# Allegro board Expand.brd
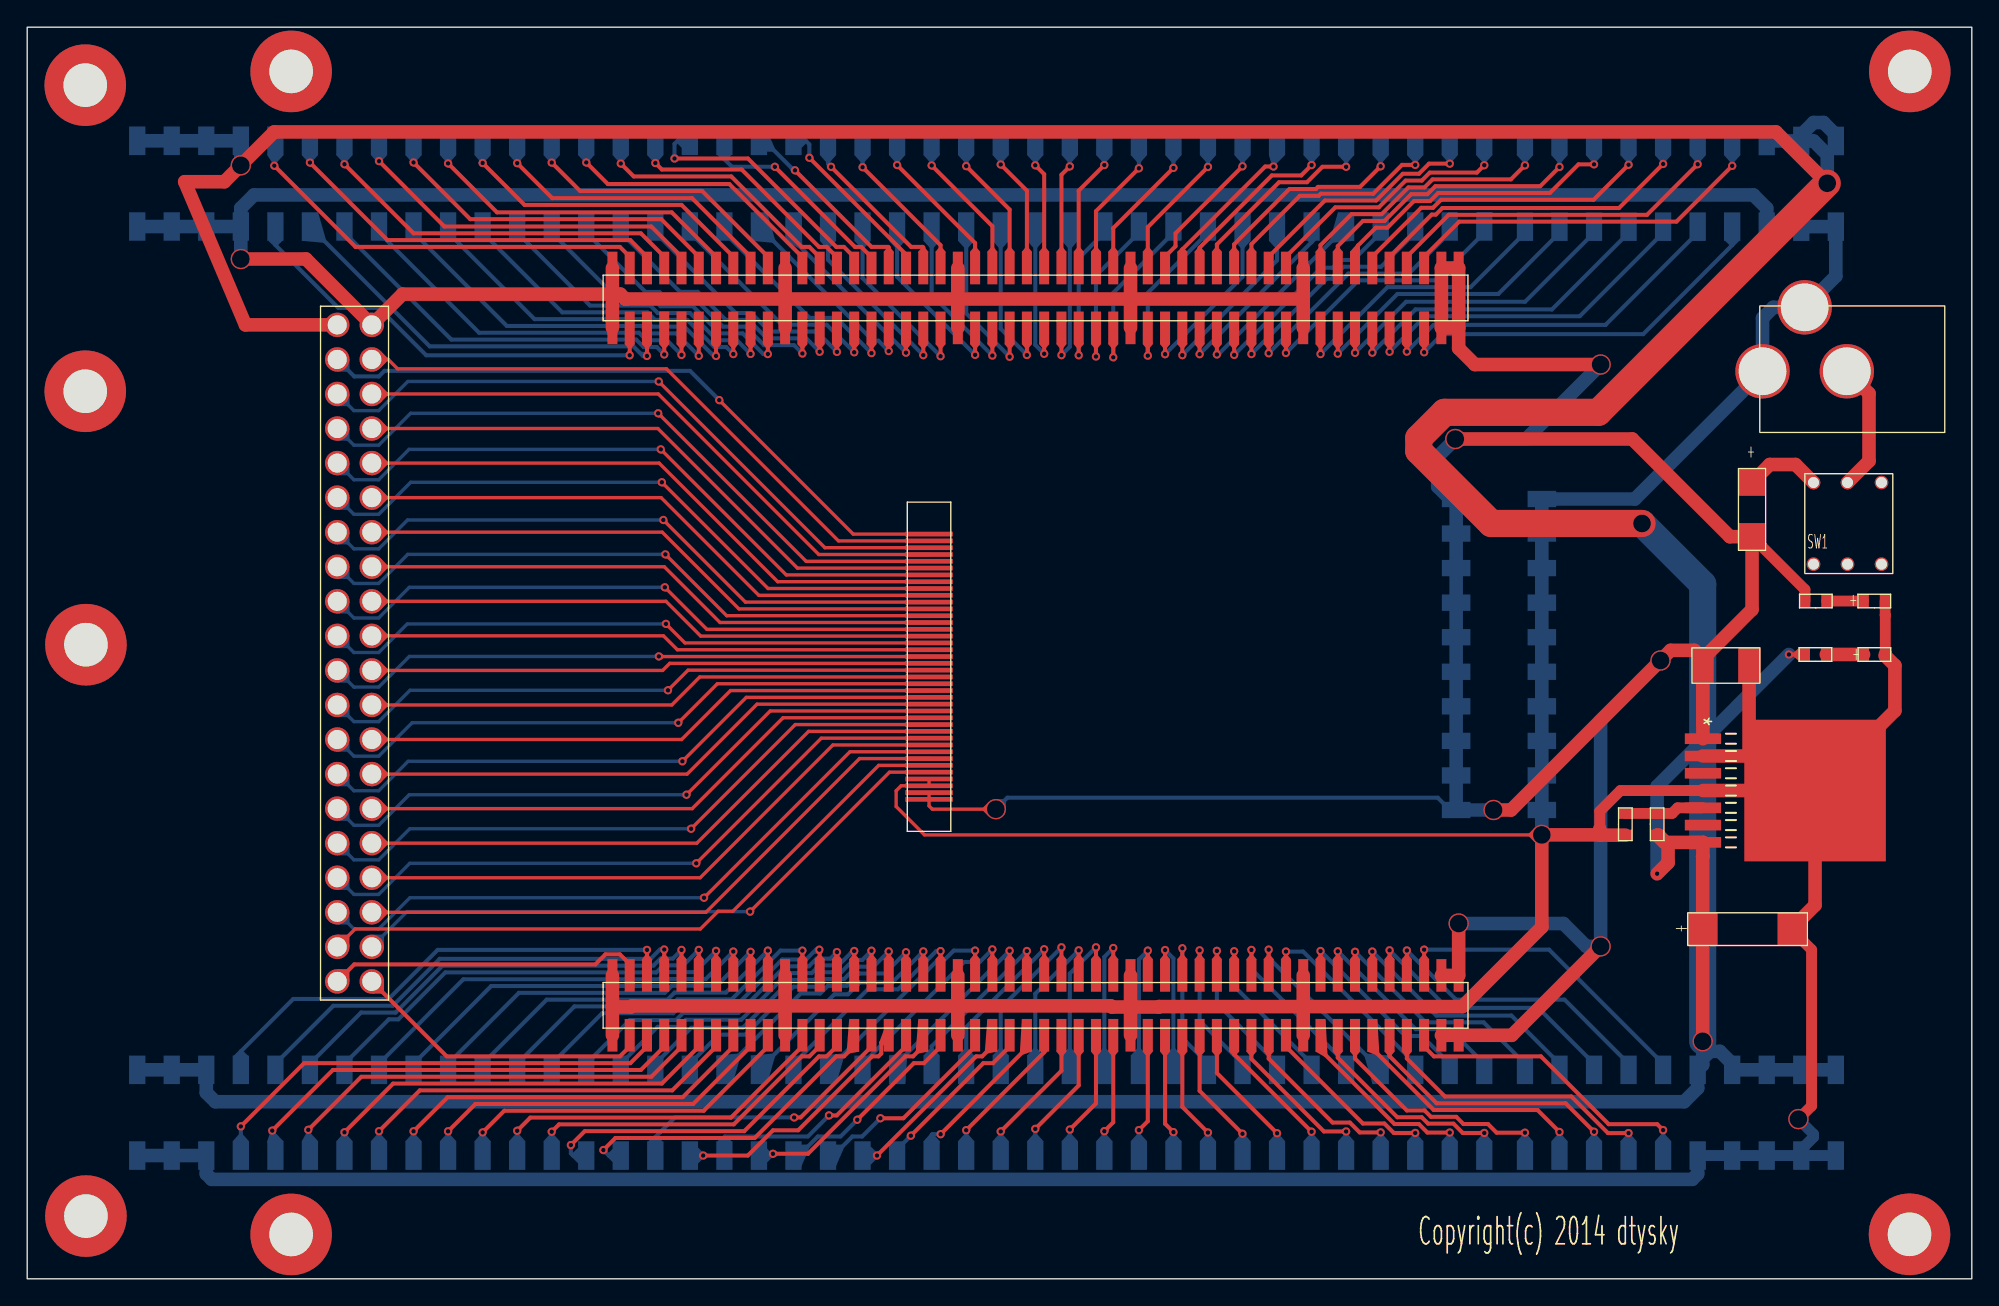
[diagram p0: board, top side]
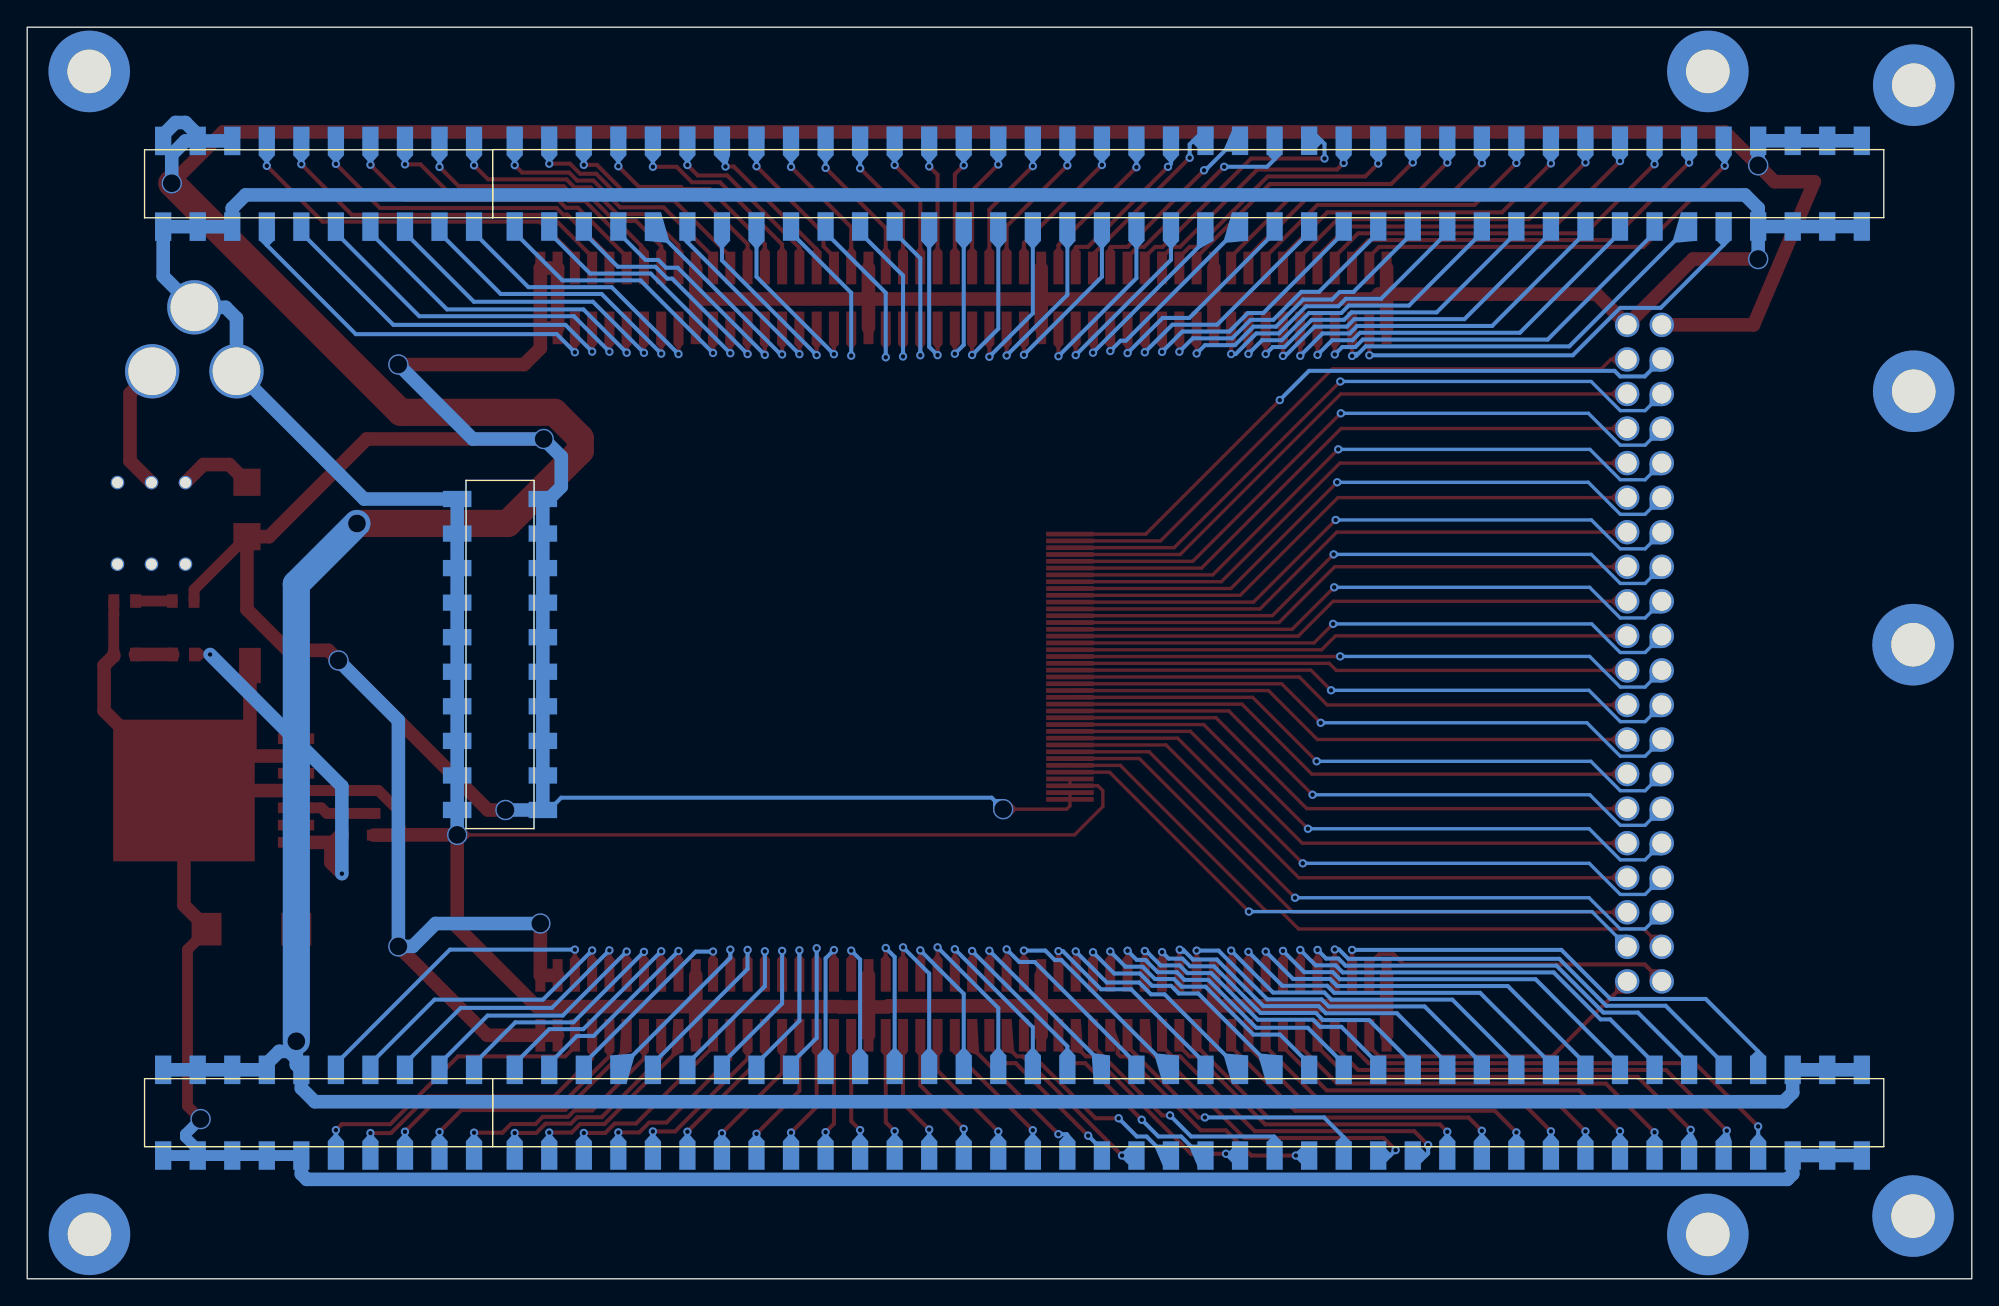
[diagram p1: board, bottom side, seen from below]

Outline 143 x 92 mm; copper layers: TOP, BOTTOM. Coordinates in mm from the lower left corner of the outline.
Outline path: rectangle 0,0 143,92

## Placement (name value [footprint] x y rotation side)
C1  22u  [SMD_1210]  124.92 45.08 90 top
C2  220u  [SMD_7343]  126.51 25.7 90 top
D1  1N5819  [SS14]  125.34 60.55 270 top
D3  0603_LED  [SMD_0603]  135.83 49.82 90 top
D4  0603_LED  [SMD_0603]  135.84 45.89 90 top
J1  Header_2X50_SMT  [HEADER_2X50__1D27_G_SMD]  74.15 72.1 90 top
J2  FPC  [FPC_0D5_40]  66.32 44.99 0 top
J3  Header_2X50_SMT  [HEADER_2X50__1D27_G_SMD]  74.15 20.1 90 top
J4  Header_2X40  [HEADER_2X40_2D54_SMT_M]  57.62 80.5 270 bottom
J5  Header_2X10  [HEADER_2X10_2D54_SMT_M]  121.57 80.49 270 bottom
J6  Header_2X20  [HEADER_2X20_2D54_DIP_G]  24.07 45.99 0 top
J7  Header_2X10  [HEADER_2X10_2D54_SMT_M]  108.23 45.89 180 bottom
J8  Header_2X40  [HEADER_2X40_2D54_SMT_M]  57.62 12.21 270 bottom
J9  Header_2X10  [HEADER_2X10_2D54_SMT_M]  121.57 12.21 270 bottom
J10  Header_1  [HOLE_3D2]  4.32 4.61 0 top
J11  Header_1  [HOLE_3D2]  4.32 46.61 0 top
J12  Header_1  [HOLE_3D2]  4.27 65.24 0 top
J13  Header_1  [HOLE_3D2]  4.27 87.74 0 top
J14  Header_1  [HOLE_3D2]  19.41 88.75 0 top
J15  Header_1  [HOLE_3D2]  138.44 88.75 0 top
J16  Header_1  [HOLE_3D2]  19.41 3.26 0 top
J17  Header_1  [HOLE_3D2]  138.42 3.27 0 top
R1  1K  [SMD_0603]  131.53 49.82 90 top
R2  1K  [SMD_0603]  131.5 45.89 90 top
R3  3.32K  [SMD_0603]  119.86 33.41 0 top
R4  1.07K  [SMD_0603]  117.52 33.41 0 top
SW1  Switch_6Pin  [SWITCH_6PIN]  134.96 69.13 0 top
U1  DC INPUT JACK  [DC_JACK]  132.41 69.51 180 top
U2  Value  [TZA07A]  131.32 35.89 270 top

## Library data of the parts
C1 C2 = CAP POL
D1 D3 D4 = DIODE SCHOTTKY
J1 J3 = Header_2X50
J2 J6 = Header_2X20
J4 J8 = Header_2X40
J5 J7 J9 = Header_2X10
J10-J17 = Header_1
R1-R4 = R
SW1 = Switch_6Pin
U1 = DC INPUT JACK
U2 = LMZ22005_NDW_7

## Footprints (pads in the part's own frame, mm; a bottom-side part is the same pattern mirrored in y, then rotated)
DC_JACK
  round 4 hole 3.5: 1(1.7,-1.9) 2(-1.4,2.8) 3(4.8,2.8)
FPC_0D5_40
  rect 3.5x0.35 smd: 1(0,9.75) 2(0,9.25) 3(0,8.75) 4(0,8.25) 5(0,7.75) 6(0,7.25) 7(0,6.75) 8(0,6.25) 9(0,5.75) 10(0,5.25) 11(0,4.75) 12(0,4.25) 13(0,3.75) 14(0,3.25) 15(0,2.75) 16(0,2.25) 17(0,1.75) 18(0,1.25) 19(0,0.75) 20(0,0.25) 21(0,-0.25) 22(0,-0.75) 23(0,-1.25) 24(0,-1.75) 25(0,-2.25) 26(0,-2.75) 27(0,-3.25) 28(0,-3.75) 29(0,-4.25) 30(0,-4.75) 31(0,-5.25) 32(0,-5.75) 33(0,-6.25) 34(0,-6.75) 35(0,-7.25) 36(0,-7.75) 37(0,-8.25) 38(0,-8.75) 39(0,-9.25) 40(0,-9.75)
HEADER_2X10_2D54_SMT_M
  rect 2.1x1.2 smd: 1(-3.15,11.43) 2(-3.15,8.89) 3(-3.15,6.35) 4(-3.15,3.81) 5(-3.15,1.27) 6(-3.15,-1.27) 7(-3.15,-3.81) 8(-3.15,-6.35) 9(-3.15,-8.89) 10(-3.15,-11.43) 11(3.15,-11.43) 12(3.15,-8.89) 13(3.15,-6.35) 14(3.15,-3.81) 15(3.15,-1.27) 16(3.15,1.27) 17(3.15,3.81) 18(3.15,6.35) 19(3.15,8.89) 20(3.15,11.43)
HEADER_2X20_2D54_DIP_G
  round 1.8 hole 1.4: 1(-1.27,24.13) 2(-1.27,21.59) 3(-1.27,19.05) 4(-1.27,16.51) 5(-1.27,13.97) 6(-1.27,11.43) 7(-1.27,8.89) 8(-1.27,6.35) 9(-1.27,3.81) 10(-1.27,1.27) 11(-1.27,-1.27) 12(-1.27,-3.81) 13(-1.27,-6.35) 14(-1.27,-8.89) 15(-1.27,-11.43) 16(-1.27,-13.97) 17(-1.27,-16.51) 18(-1.27,-19.05) 19(-1.27,-21.59) 20(-1.27,-24.13) 21(1.27,-24.13) 22(1.27,-21.59) 23(1.27,-19.05) 24(1.27,-16.51) 25(1.27,-13.97) 26(1.27,-11.43) 27(1.27,-8.89) 28(1.27,-6.35) 29(1.27,-3.81) 30(1.27,-1.27) 31(1.27,1.27) 32(1.27,3.81) 33(1.27,6.35) 34(1.27,8.89) 35(1.27,11.43) 36(1.27,13.97) 37(1.27,16.51) 38(1.27,19.05) 39(1.27,21.59) 40(1.27,24.13)
HEADER_2X40_2D54_SMT_M
  rect 2.1x1.2 smd: 1(-3.15,49.53) 2(-3.15,46.99) 3(-3.15,44.45) 4(-3.15,41.91) 5(-3.15,39.37) 6(-3.15,36.83) 7(-3.15,34.29) 8(-3.15,31.75) 9(-3.15,29.21) 10(-3.15,26.67) 11(-3.15,24.13) 12(-3.15,21.59) 13(-3.15,19.05) 14(-3.15,16.51) 15(-3.15,13.97) 16(-3.15,11.43) 17(-3.15,8.89) 18(-3.15,6.35) 19(-3.15,3.81) 20(-3.15,1.27) 21(-3.15,-1.27) 22(-3.15,-3.81) 23(-3.15,-6.35) 24(-3.15,-8.89) 25(-3.15,-11.43) 26(-3.15,-13.97) 27(-3.15,-16.51) 28(-3.15,-19.05) 29(-3.15,-21.59) 30(-3.15,-24.13) 31(-3.15,-26.67) 32(-3.15,-29.21) 33(-3.15,-31.75) 34(-3.15,-34.29) 35(-3.15,-36.83) 36(-3.15,-39.37) 37(-3.15,-41.91) 38(-3.15,-44.45) 39(-3.15,-46.99) 40(-3.15,-49.53) 41(3.15,-49.53) 42(3.15,-46.99) 43(3.15,-44.45) 44(3.15,-41.91) 45(3.15,-39.37) 46(3.15,-36.83) 47(3.15,-34.29) 48(3.15,-31.75) 49(3.15,-29.21) 50(3.15,-26.67) 51(3.15,-24.13) 52(3.15,-21.59) 53(3.15,-19.05) 54(3.15,-16.51) 55(3.15,-13.97) 56(3.15,-11.43) 57(3.15,-8.89) 58(3.15,-6.35) 59(3.15,-3.81) 60(3.15,-1.27) 61(3.15,1.27) 62(3.15,3.81) 63(3.15,6.35) 64(3.15,8.89) 65(3.15,11.43) 66(3.15,13.97) 67(3.15,16.51) 68(3.15,19.05) 69(3.15,21.59) 70(3.15,24.13) 71(3.15,26.67) 72(3.15,29.21) 73(3.15,31.75) 74(3.15,34.29) 75(3.15,36.83) 76(3.15,39.37) 77(3.15,41.91) 78(3.15,44.45) 79(3.15,46.99) 80(3.15,49.53)
HEADER_2X50__1D27_G_SMD
  rect 2.4x0.74 smd: 1(-2.2,31.115) 2(-2.2,29.845) 3(-2.2,28.575) 4(-2.2,27.305) 5(-2.2,26.035) 6(-2.2,24.765) 7(-2.2,23.495) 8(-2.2,22.225) 9(-2.2,20.955) 10(-2.2,19.685) 11(-2.2,18.415) 12(-2.2,17.145) 13(-2.2,15.875) 14(-2.2,14.605) 15(-2.2,13.335) 16(-2.2,12.065) 17(-2.2,10.795) 18(-2.2,9.525) 19(-2.2,8.255) 20(-2.2,6.985) 21(-2.2,5.715) 22(-2.2,4.445) 23(-2.2,3.175) 24(-2.2,1.905) 25(-2.2,0.635) 26(-2.2,-0.635) 27(-2.2,-1.905) 28(-2.2,-3.175) 29(-2.2,-4.445) 30(-2.2,-5.715) 31(-2.2,-6.985) 32(-2.2,-8.255) 33(-2.2,-9.525) 34(-2.2,-10.795) 35(-2.2,-12.065) 36(-2.2,-13.335) 37(-2.2,-14.605) 38(-2.2,-15.875) 39(-2.2,-17.145) 40(-2.2,-18.415) 41(-2.2,-19.685) 42(-2.2,-20.955) 43(-2.2,-22.225) 44(-2.2,-23.495) 45(-2.2,-24.765) 46(-2.2,-26.035) 47(-2.2,-27.305) 48(-2.2,-28.575) 49(-2.2,-29.845) 50(-2.2,-31.115) 51(2.2,-31.115) 52(2.2,-29.845) 53(2.2,-28.575) 54(2.2,-27.305) 55(2.2,-26.035) 56(2.2,-24.765) 57(2.2,-23.495) 58(2.2,-22.225) 59(2.2,-20.955) 60(2.2,-19.685) 61(2.2,-18.415) 62(2.2,-17.145) 63(2.2,-15.875) 64(2.2,-14.605) 65(2.2,-13.335) 66(2.2,-12.065) 67(2.2,-10.795) 68(2.2,-9.525) 69(2.2,-8.255) 70(2.2,-6.985) 71(2.2,-5.715) 72(2.2,-4.445) 73(2.2,-3.175) 74(2.2,-1.905) 75(2.2,-0.635) 76(2.2,0.635) 77(2.2,1.905) 78(2.2,3.175) 79(2.2,4.445) 80(2.2,5.715) 81(2.2,6.985) 82(2.2,8.255) 83(2.2,9.525) 84(2.2,10.795) 85(2.2,12.065) 86(2.2,13.335) 87(2.2,14.605) 88(2.2,15.875) 89(2.2,17.145) 90(2.2,18.415) 91(2.2,19.685) 92(2.2,20.955) 93(2.2,22.225) 94(2.2,23.495) 95(2.2,24.765) 96(2.2,26.035) 97(2.2,27.305) 98(2.2,28.575) 99(2.2,29.845) 100(2.2,31.115)
HOLE_3D2
  round 6 hole 3.2: 1(0,0)
SMD_0603
  rect 1x0.8 smd: 1(0,0.8) 2(0,-0.8)
SMD_1210
  rect 2.6x1.6 smd: 1(0,1.7) 2(0,-1.7)
SMD_7343
  rect 2.4x2.2 smd: 1(0,3.3) 2(0,-3.3)
SS14
  rect 2x2 smd: 1(2,1.5) 2(6,1.5)
SWITCH_6PIN
  round 1 hole 0.8: 1(-3.6,-10.6) 2(-1.1,-10.6) 3(1.4,-10.6) 4(1.4,-16.6) 5(-1.1,-16.6) 6(-3.6,-16.6)
TZA07A
  rect 0.787x2.667 smd: 1(-3.81,-8.09) 2(-2.54,-8.09) 3(-1.27,-8.09) 4(0,-8.09) 5(1.27,-8.09) 6(2.54,-8.09) 7(3.81,-8.09)
  rect 10.414x10.414 smd: 8(0,0.152)

## Nets
GND: C1.2 C2.2 D3.2(CATHODE) D4.2(CATHODE) J1.1(DIP_1) J1.11(DIP_11) J1.21(DIP_21) J1.31(DIP_31) J1.41(DIP_41) J1.60(DIP_60) J1.70(DIP_70) J1.80(DIP_80) J1.90(DIP_90) J1.100(DIP_100) J2.37(DIP_37) J2.38(DIP_38) J3.1(DIP_1) J3.11(DIP_11) J3.21(DIP_21) J3.31(DIP_31) J3.41(DIP_41) J3.60(DIP_60) J3.70(DIP_70) J3.80(DIP_80) J3.90(DIP_90) J3.100(DIP_100) J4.77(DIP_77) J4.78(DIP_78) J4.79(DIP_79) J4.80(DIP_80) J5.11(DIP_11) J5.12(DIP_12) J5.13(DIP_13) J6.40(DIP_40) J7.1(DIP_1) J7.2(DIP_2) J7.3(DIP_3) J7.4(DIP_4) J7.5(DIP_5) J7.6(DIP_6) J7.7(DIP_7) J7.8(DIP_8) J7.9(DIP_9) J7.10(DIP_10) J8.78(DIP_78) J8.79(DIP_79) J8.80(DIP_80) J9.11(DIP_11) J9.12(DIP_12) J9.13(DIP_13) J9.14(DIP_14) J9.15(DIP_15) R4.2 U1.1(GND#1) U1.3(GND#3) U2.2(SYNC) U2.4(AGND) U2.8
VCC: C2.1 J4.1(DIP_1) J4.2(DIP_2) J4.3(DIP_3) J4.4(DIP_4) J5.8(DIP_8) J5.9(DIP_9) J5.10(DIP_10) J6.1(DIP_1) J8.1(DIP_1) J8.2(DIP_2) J8.3(DIP_3) J9.6(DIP_6) J9.7(DIP_7) J9.8(DIP_8) J9.9(DIP_9) J9.10(DIP_10) R2.1 R3.2 U2.7(VOUT)
DATA_A0: J1.53(DIP_53) J5.7(DIP_7)
DATA_A1: J1.54(DIP_54) J5.6(DIP_6)
DATA_A2: J1.55(DIP_55) J5.5(DIP_5)
DATA_A3: J1.56(DIP_56) J5.4(DIP_4)
DATA_A4: J1.57(DIP_57) J5.3(DIP_3)
DATA_A5: J1.58(DIP_58) J5.2(DIP_2)
DATA_A6: J1.59(DIP_59) J5.1(DIP_1)
DATA_A7: J1.61(DIP_61) J4.40(DIP_40)
DATA_A8: J1.62(DIP_62) J4.39(DIP_39)
DATA_A9: J1.63(DIP_63) J4.38(DIP_38)
DATA_A10: J1.64(DIP_64) J4.37(DIP_37)
DATA_A11: J1.65(DIP_65) J4.36(DIP_36)
DATA_A12: J1.66(DIP_66) J4.35(DIP_35)
DATA_A13: J1.67(DIP_67) J4.34(DIP_34)
DATA_A14: J1.68(DIP_68) J4.33(DIP_33)
DATA_A15: J1.69(DIP_69) J4.32(DIP_32)
DATA_A16: J1.71(DIP_71) J4.31(DIP_31)
DATA_A17: J1.72(DIP_72) J4.30(DIP_30)
DATA_A18: J1.73(DIP_73) J4.29(DIP_29)
DATA_A19: J1.74(DIP_74) J4.28(DIP_28)
DATA_A20: J1.75(DIP_75) J4.27(DIP_27)
DATA_A21: J1.76(DIP_76) J4.26(DIP_26)
DATA_A22: J1.77(DIP_77) J4.25(DIP_25)
DATA_A23: J1.78(DIP_78) J4.24(DIP_24)
DATA_A24: J1.79(DIP_79) J4.23(DIP_23)
DATA_A25: J1.81(DIP_81) J4.22(DIP_22)
DATA_A26: J1.82(DIP_82) J4.21(DIP_21)
DATA_A27: J1.83(DIP_83) J4.20(DIP_20)
DATA_A28: J1.84(DIP_84) J4.19(DIP_19)
DATA_A29: J1.85(DIP_85) J4.18(DIP_18)
DATA_A30: J1.86(DIP_86) J4.17(DIP_17)
DATA_A31: J1.87(DIP_87) J4.16(DIP_16)
DATA_A32: J1.88(DIP_88) J4.15(DIP_15)
DATA_A33: J1.89(DIP_89) J4.14(DIP_14)
DATA_A34: J1.91(DIP_91) J4.13(DIP_13)
DATA_A35: J1.92(DIP_92) J4.12(DIP_12)
DATA_A36: J1.93(DIP_93) J4.11(DIP_11)
DATA_A37: J1.94(DIP_94) J4.10(DIP_10)
DATA_A38: J1.95(DIP_95) J4.9(DIP_9)
DATA_A39: J1.96(DIP_96) J4.8(DIP_8)
DATA_A40: J1.97(DIP_97) J4.7(DIP_7)
DATA_A41: J1.98(DIP_98) J4.6(DIP_6)
DATA_A42: J1.99(DIP_99) J4.5(DIP_5)
DATA_B0: J1.48(DIP_48) J5.14(DIP_14)
DATA_B1: J1.47(DIP_47) J5.15(DIP_15)
DATA_B2: J1.46(DIP_46) J5.16(DIP_16)
DATA_B3: J1.45(DIP_45) J5.17(DIP_17)
DATA_B4: J1.44(DIP_44) J5.18(DIP_18)
DATA_B5: J1.43(DIP_43) J5.19(DIP_19)
DATA_B6: J1.42(DIP_42) J5.20(DIP_20)
DATA_B7: J1.40(DIP_40) J4.41(DIP_41)
DATA_B8: J1.39(DIP_39) J4.42(DIP_42)
DATA_B9: J1.38(DIP_38) J4.43(DIP_43)
DATA_B10: J1.37(DIP_37) J4.44(DIP_44)
DATA_B11: J1.36(DIP_36) J4.45(DIP_45)
DATA_B12: J1.35(DIP_35) J4.46(DIP_46)
DATA_B13: J1.34(DIP_34) J4.47(DIP_47)
DATA_B14: J1.33(DIP_33) J4.48(DIP_48)
DATA_B15: J1.32(DIP_32) J4.49(DIP_49)
DATA_B16: J1.30(DIP_30) J4.50(DIP_50)
DATA_B17: J1.29(DIP_29) J4.51(DIP_51)
DATA_B18: J1.28(DIP_28) J4.52(DIP_52)
DATA_B19: J1.27(DIP_27) J4.53(DIP_53)
DATA_B20: J1.26(DIP_26) J4.54(DIP_54)
DATA_B21: J1.25(DIP_25) J4.55(DIP_55)
DATA_B22: J1.24(DIP_24) J4.56(DIP_56)
DATA_B23: J1.23(DIP_23) J4.57(DIP_57)
DATA_B24: J1.22(DIP_22) J4.58(DIP_58)
DATA_B25: J1.20(DIP_20) J4.59(DIP_59)
DATA_B26: J1.19(DIP_19) J4.60(DIP_60)
DATA_B27: J1.18(DIP_18) J4.61(DIP_61)
DATA_B28: J1.17(DIP_17) J4.62(DIP_62)
DATA_B29: J1.16(DIP_16) J4.63(DIP_63)
DATA_B30: J1.15(DIP_15) J4.64(DIP_64)
DATA_B31: J1.14(DIP_14) J4.65(DIP_65)
DATA_B32: J1.13(DIP_13) J4.66(DIP_66)
DATA_B33: J1.12(DIP_12) J4.67(DIP_67)
DATA_B34: J1.10(DIP_10) J4.68(DIP_68)
DATA_B35: J1.9(DIP_9) J4.69(DIP_69)
DATA_B36: J1.8(DIP_8) J4.70(DIP_70)
DATA_B37: J1.7(DIP_7) J4.71(DIP_71)
DATA_B38: J1.6(DIP_6) J4.72(DIP_72)
DATA_B39: J1.5(DIP_5) J4.73(DIP_73)
DATA_B40: J1.4(DIP_4) J4.74(DIP_74)
DATA_B41: J1.3(DIP_3) J4.75(DIP_75)
DATA_B42: J1.2(DIP_2) J4.76(DIP_76)
DATA_C0: J3.53(DIP_53) J9.5(DIP_5)
DATA_C1: J3.54(DIP_54) J9.4(DIP_4)
DATA_C2: J3.55(DIP_55) J9.3(DIP_3)
DATA_C3: J3.56(DIP_56) J9.2(DIP_2)
DATA_C4: J3.57(DIP_57) J9.1(DIP_1)
DATA_C5: J3.58(DIP_58) J8.40(DIP_40)
DATA_C6: J3.59(DIP_59) J8.39(DIP_39)
DATA_C7: J3.61(DIP_61) J8.38(DIP_38)
DATA_C8: J3.62(DIP_62) J8.37(DIP_37)
DATA_C9: J3.63(DIP_63) J8.36(DIP_36)
DATA_C10: J3.64(DIP_64) J8.35(DIP_35)
DATA_C11: J3.65(DIP_65) J8.34(DIP_34)
DATA_C12: J3.66(DIP_66) J8.33(DIP_33)
DATA_C13: J3.67(DIP_67) J8.32(DIP_32)
DATA_C14: J3.68(DIP_68) J8.31(DIP_31)
DATA_C15: J3.69(DIP_69) J8.30(DIP_30)
DATA_C16: J3.71(DIP_71) J8.29(DIP_29)
DATA_C17: J3.72(DIP_72) J8.28(DIP_28)
DATA_C18: J3.73(DIP_73) J8.27(DIP_27)
DATA_C19: J3.74(DIP_74) J8.26(DIP_26)
DATA_C20: J3.75(DIP_75) J8.25(DIP_25)
DATA_C21: J3.76(DIP_76) J8.24(DIP_24)
DATA_C22: J3.77(DIP_77) J8.23(DIP_23)
DATA_C23: J3.78(DIP_78) J8.22(DIP_22)
DATA_C24: J3.79(DIP_79) J8.21(DIP_21)
DATA_C25: J3.81(DIP_81) J8.20(DIP_20)
DATA_C26: J3.82(DIP_82) J8.19(DIP_19)
DATA_C27: J3.83(DIP_83) J8.18(DIP_18)
DATA_C28: J3.84(DIP_84) J8.17(DIP_17)
DATA_C29: J3.85(DIP_85) J8.16(DIP_16)
DATA_C30: J3.86(DIP_86) J8.15(DIP_15)
DATA_C31: J3.87(DIP_87) J8.14(DIP_14)
DATA_C32: J3.88(DIP_88) J8.13(DIP_13)
DATA_C33: J3.89(DIP_89) J8.12(DIP_12)
DATA_C34: J3.91(DIP_91) J8.11(DIP_11)
DATA_C35: J3.92(DIP_92) J8.10(DIP_10)
DATA_C36: J3.93(DIP_93) J8.9(DIP_9)
DATA_C37: J3.94(DIP_94) J8.8(DIP_8)
DATA_C38: J3.95(DIP_95) J8.7(DIP_7)
DATA_C39: J3.96(DIP_96) J8.6(DIP_6)
DATA_C40: J3.97(DIP_97) J8.5(DIP_5)
DATA_C41: J3.98(DIP_98) J8.4(DIP_4)
DATA_C42: J3.99(DIP_99) J6.20(DIP_20)
DATA_D0: J3.48(DIP_48) J9.16(DIP_16)
DATA_D1: J3.47(DIP_47) J9.17(DIP_17)
DATA_D2: J3.46(DIP_46) J9.18(DIP_18)
DATA_D3: J3.45(DIP_45) J9.19(DIP_19)
DATA_D4: J3.44(DIP_44) J9.20(DIP_20)
DATA_D5: J3.43(DIP_43) J8.41(DIP_41)
DATA_D6: J3.42(DIP_42) J8.42(DIP_42)
DATA_D7: J3.40(DIP_40) J8.43(DIP_43)
DATA_D8: J3.39(DIP_39) J8.44(DIP_44)
DATA_D9: J3.38(DIP_38) J8.45(DIP_45)
DATA_D10: J3.37(DIP_37) J8.46(DIP_46)
DATA_D11: J3.36(DIP_36) J8.47(DIP_47)
DATA_D12: J3.35(DIP_35) J8.48(DIP_48)
DATA_D13: J3.34(DIP_34) J8.49(DIP_49)
DATA_D14: J3.33(DIP_33) J8.50(DIP_50)
DATA_D15: J3.32(DIP_32) J8.51(DIP_51)
DATA_D16: J3.30(DIP_30) J8.52(DIP_52)
DATA_D17: J3.29(DIP_29) J8.53(DIP_53)
DATA_D18: J3.28(DIP_28) J8.54(DIP_54)
DATA_D19: J3.27(DIP_27) J8.55(DIP_55)
DATA_D20: J3.26(DIP_26) J8.56(DIP_56)
DATA_D21: J3.25(DIP_25) J8.57(DIP_57)
DATA_D22: J3.24(DIP_24) J8.58(DIP_58)
DATA_D23: J3.23(DIP_23) J8.59(DIP_59)
DATA_D24: J3.22(DIP_22) J8.60(DIP_60)
DATA_D25: J3.20(DIP_20) J8.61(DIP_61)
DATA_D26: J3.19(DIP_19) J8.62(DIP_62)
DATA_D27: J3.18(DIP_18) J8.63(DIP_63)
DATA_D28: J3.17(DIP_17) J8.64(DIP_64)
DATA_D29: J3.16(DIP_16) J8.65(DIP_65)
DATA_D30: J3.15(DIP_15) J8.66(DIP_66)
DATA_D31: J3.14(DIP_14) J8.67(DIP_67)
DATA_D32: J3.13(DIP_13) J8.68(DIP_68)
DATA_D33: J3.12(DIP_12) J8.69(DIP_69)
DATA_D34: J3.10(DIP_10) J8.70(DIP_70)
DATA_D35: J3.9(DIP_9) J8.71(DIP_71)
DATA_D36: J3.8(DIP_8) J8.72(DIP_72)
DATA_D37: J3.7(DIP_7) J8.73(DIP_73)
DATA_D38: J3.6(DIP_6) J8.74(DIP_74)
DATA_D39: J3.5(DIP_5) J8.75(DIP_75)
DATA_D40: J3.4(DIP_4) J8.76(DIP_76)
DATA_D41: J3.3(DIP_3) J8.77(DIP_77)
DATA_D42: J3.2(DIP_2) J6.21(DIP_21)
DATA_E0: J2.36(DIP_36) J6.22(DIP_22)
DATA_E1: J2.35(DIP_35) J6.19(DIP_19)
DATA_E2: J2.34(DIP_34) J6.23(DIP_23)
DATA_E3: J2.33(DIP_33) J6.18(DIP_18)
DATA_E4: J2.32(DIP_32) J6.24(DIP_24)
DATA_E5: J2.31(DIP_31) J6.17(DIP_17)
DATA_E6: J2.30(DIP_30) J6.25(DIP_25)
DATA_E7: J2.29(DIP_29) J6.16(DIP_16)
DATA_E8: J2.28(DIP_28) J6.26(DIP_26)
DATA_E9: J2.27(DIP_27) J6.15(DIP_15)
DATA_E10: J2.26(DIP_26) J6.27(DIP_27)
DATA_E11: J2.25(DIP_25) J6.14(DIP_14)
DATA_E12: J2.24(DIP_24) J6.28(DIP_28)
DATA_E13: J2.23(DIP_23) J6.13(DIP_13)
DATA_E14: J2.22(DIP_22) J6.29(DIP_29)
DATA_E15: J2.21(DIP_21) J6.12(DIP_12)
DATA_E16: J2.20(DIP_20) J6.30(DIP_30)
DATA_E17: J2.19(DIP_19) J6.11(DIP_11)
DATA_E18: J2.18(DIP_18) J6.31(DIP_31)
DATA_E19: J2.17(DIP_17) J6.10(DIP_10)
DATA_E20: J2.16(DIP_16) J6.32(DIP_32)
DATA_E21: J2.15(DIP_15) J6.9(DIP_9)
DATA_E22: J2.14(DIP_14) J6.33(DIP_33)
DATA_E23: J2.13(DIP_13) J6.8(DIP_8)
DATA_E24: J2.12(DIP_12) J6.34(DIP_34)
DATA_E25: J2.11(DIP_11) J6.7(DIP_7)
DATA_E26: J2.10(DIP_10) J6.35(DIP_35)
DATA_E27: J2.9(DIP_9) J6.6(DIP_6)
DATA_E28: J2.8(DIP_8) J6.36(DIP_36)
DATA_E29: J2.7(DIP_7) J6.5(DIP_5)
DATA_E30: J2.6(DIP_6) J6.37(DIP_37)
DATA_E31: J2.5(DIP_5) J6.4(DIP_4)
DATA_E32: J2.4(DIP_4) J6.38(DIP_38)
DATA_E33: J2.3(DIP_3) J6.3(DIP_3)
DATA_E34: J2.2(DIP_2) J6.39(DIP_39)
DATA_E35: J2.1(DIP_1) J6.2(DIP_2)
DC: C1.1 D1.2(CATHODE) J1.49(DIP_49) J1.50(DIP_50) J1.51(DIP_51) J1.52(DIP_52) J2.39(DIP_39) J2.40(DIP_40) J3.49(DIP_49) J3.50(DIP_50) J3.51(DIP_51) J3.52(DIP_52) J7.11(DIP_11) J7.12(DIP_12) J7.13(DIP_13) J7.14(DIP_14) J7.15(DIP_15) J7.16(DIP_16) J7.17(DIP_17) J7.18(DIP_18) J7.19(DIP_19) J7.20(DIP_20) R1.1 U2.1(VIN)
N1199797: R3.1 R4.1 U2.5(FB)
N1275432: D3.1(ANODE) R1.2
N1275546: SW1.2 U1.2(VOUT)
N1277606: D4.1(ANODE) R2.2
N4921826: D1.1(ANODE) SW1.1

Pads without a net: J10 1; J11 1; J12 1; J13 1; J14 1; J15 1; J16 1; J17 1; SW1 3 4 5 6; U2 3 6

## Via types
v1: diameter 0.61, hole 0.33, TOP to BOTTOM, 190 vias
v2: diameter 1.5, hole 1.3, TOP to BOTTOM, 14 vias

## Routing (per net, layer and track width the routed paths; a pad name or vN(x,y) marks a point on that pad's centre or on a via; arc(x,y) is an arc through that point)
GND: length 659.7
  TOP w0.25: v2(111.38,32.63) 65.98,32.63 63.9,34.71 63.9,35.87 64.27,36.24 J2.38 J2.37
  TOP w0.8: D4.2 136.64,48.78 136.63,48.79 D3.2 ; 115.64,33.06 115.64,34.37 117.16,35.89 U2.4 ; C2.2 129.81,25.6 131.21,24.2 131.21,12.7 v2(130.25,11.74)
  TOP w1: J1.11 55.73,72.02 ; 55.73,72.02 J1.90 ; 55.73,72.02 43.98,72.02 43.62,72.38 43.03,72.38 ; 55.73,72.02 68.44,72.02 ; 55.73,20.02 55.9,20.02 55.9,20.06 ; 55.73,20.02 J3.11 ; 55.73,20.02 J3.90 ; J3.1 43.03,19.99 ; 43.03,19.99 44.41,19.99 44.48,20.06 55.9,20.06 ; 43.03,19.99 J3.100 ; C2.2 129.81,25.8 131.47,27.46 U2.8 ; 115.64,33.06 115.64,32.63 ; 115.64,32.63 v2(111.38,32.63) 111.38,25.85 105.54,20.01 93.83,20.01 ; 115.64,32.63 115.66,32.61 R4.2 ; 68.44,20.06 55.9,20.06 ; 68.44,20.06 J3.80 ; 68.44,20.06 J3.21 ; 68.44,20.06 79.68,20.06 79.76,19.98 81.14,19.98 ; J1.70 81.14,72.02 ; 81.14,72.02 J1.31 ; 81.14,72.02 93.83,72.02 ; 81.14,72.02 68.44,72.02 ; J1.1 43.03,72.38 ; 43.03,72.38 27.6,72.38 J6.40 20.5,74.96 v2(15.71,74.96) ; 43.03,72.38 J1.100 ; 81.14,19.98 83.21,19.98 83.24,20.01 93.83,20.01 ; 81.14,19.98 J3.70 ; 81.14,19.98 J3.31 ; U2.8 U2.4 ; U2.8 128.93,38.43 126.62,38.43 ; U2.8 137.34,41.76 137.34,45.09 136.64,45.79 D4.2 ; U2.2 126.62,38.43 ; 126.62,38.43 C1.2 ; J3.60 93.83,20.01 ; 93.83,20.01 J3.41 ; 93.83,72.02 J1.41 ; 93.83,72.02 J1.60 ; 68.44,72.02 J1.21 ; 68.44,72.02 J1.80
  BOTTOM w0.8: v2(130.25,11.74) 131.36,10.63 131.36,10.41 130.46,9.51 J9.12 ; J9.15 J9.14 J9.13 J9.12 ; J9.12 J9.11
  BOTTOM w1: J8.80 J8.79 J8.78 13.17,7.71 13.57,7.31 122.44,7.31 122.84,7.71 J9.15 ; v2(111.38,32.63) J7.10 J7.9 J7.8 J7.7 J7.6 J7.5 J7.4 J7.3 J7.2 J7.1 118.22,57.32 U1.3 127.61,70.61 128.41,71.41 U1.1 133,73.7 J5.11 J5.12 J5.13 127.92,78.69 126.94,79.67 16.68,79.67 15.71,78.7 J4.77 ; J4.77 J4.78 J4.79 J4.80 ; J4.77 v2(15.71,74.96)
VCC: length 435.5
  TOP w0.25: R2.1 v1(129.55,45.89)
  TOP w1: v2(132.37,80.53) 128.6,84.3 18.16,84.3 v2(15.71,81.85) 14.5,80.64 11.58,80.64 16.05,70.12 J6.1 ; v2(123.21,17.46) C2.1 123.21,31.04 123.23,31.06 U2.7 120.39,32.08 R3.2 119.96,32.61 120.66,31.91 120.66,30.58 v1(119.86,29.78)
  TOP w2: v2(132.37,80.53) 115.53,63.69 104.22,63.69 102.33,61.8 102.33,60.85 107.66,55.52 v2(118.75,55.52)
  BOTTOM w1: v2(132.37,80.53) 132.37,82.63 131.36,83.64 J5.9 ; v1(129.55,45.89) 119.86,36.2 v1(119.86,29.78) ; J9.6 123.21,15.73 v2(123.21,17.46) ; J9.6 122.84,15.81 123.74,16.71 124.48,16.71 125.38,15.81 J9.7 J9.8 J9.9 J9.10 ; J9.6 122.84,14.01 121.85,13.01 13.84,13.01 13.17,13.68 J8.3 J8.2 J8.1 ; v2(15.71,81.85) J4.4 J4.3 J4.2 J4.1 ; J5.9 J5.8 ; J5.9 130.46,84.09 131.36,84.99 132.1,84.99 133,84.09 J5.10
  BOTTOM w2: v2(123.21,17.46) 123.21,51.06 v2(118.75,55.52)
DATA_A0: length 28.1
  TOP w0.3: v1(125.38,81.81) 121.28,77.71 105.31,77.71 102.72,75.13 102.72,74.3
  BOTTOM w0.3: J5.7 v1(125.38,81.81)
DATA_A1: length 26.7
  TOP w0.3: J1.54 101.45,75.13 104.53,78.21 119.12,78.21 v1(122.84,81.93)
  BOTTOM w0.3: J5.6 v1(122.84,81.93)
DATA_A2: length 25.5
  TOP w0.3: v1(120.3,81.95) 117.06,78.71 104.07,78.71 103.58,78.23 103.28,78.23 100.19,75.13 J1.55
  BOTTOM w0.3: J5.5 v1(120.3,81.95)
DATA_A3: length 24.2
  TOP w0.3: v1(117.76,81.89) 115.19,79.32 103.97,79.32 103.38,78.73 102.51,78.73 98.92,75.13 J1.56
  BOTTOM w0.3: J5.4 v1(117.76,81.89)
DATA_A4: length 23.3
  TOP w0.3: 97.64,74.3 97.86,74.52 97.86,75.95 99.17,77.26 100.02,77.26 101.98,79.23 103.17,79.23 103.76,79.82 111.97,79.82 114.08,81.92 v1(115.22,81.92)
  BOTTOM w0.3: J5.3 v1(115.22,81.92)
DATA_A5: length 22.2
  TOP w0.3: J1.58 96.38,75.91 98.23,77.76 99.81,77.76 101.78,79.73 102.96,79.73 103.55,80.32 111.27,80.32 v1(112.68,81.73)
  BOTTOM w0.3: J5.2 v1(112.68,81.73)
DATA_A6: length 20.9
  TOP w0.3: v1(110.14,81.85) 109.11,80.82 103.35,80.82 102.76,80.23 101.57,80.23 99.6,78.26 97.39,78.26 95.11,75.97 J1.59
  BOTTOM w0.3: J5.1 v1(110.14,81.85)
DATA_A7: length 20
  TOP w0.3: J1.61 92.56,75.13 96.19,78.76 99.4,78.76 101.36,80.73 102.55,80.73 103.14,81.32 106.61,81.32 v1(107.15,81.86)
  BOTTOM w0.3: J4.40 v1(107.15,81.86)
DATA_A8: length 18.7
  TOP w0.3: v1(104.61,81.97) 103.09,81.97 102.34,81.23 101.16,81.23 99.19,79.26 95.42,79.26 91.3,75.13 J1.62
  BOTTOM w0.3: J4.39 v1(104.61,81.97)
DATA_A9: length 18
  TOP w0.3: J1.63 90.03,76.05 93.58,79.61 94.97,79.61 95.13,79.76 98.98,79.76 101.1,81.88 v1(102.07,81.88)
  BOTTOM w0.3: J4.38 v1(102.07,81.88)
DATA_A10: length 16.8
  TOP w0.3: J1.64 88.75,76.04 92.82,80.11 94.77,80.11 94.92,80.26 98.01,80.26 v1(99.53,81.78)
  BOTTOM w0.3: J4.37 v1(99.53,81.78)
DATA_A11: length 15.5
  TOP w0.3: v1(96.99,81.74) 95.25,81.74 94.11,80.61 92.06,80.61 87.48,76.03 87.48,74.3
  BOTTOM w0.3: J4.36 v1(96.99,81.74)
DATA_A12: length 14
  TOP w0.3: J1.66 86.22,75.79 91.53,81.11 93.69,81.11 v1(94.45,81.87)
  BOTTOM w0.3: J4.35 v1(94.45,81.87)
DATA_A13: length 12.6
  TOP w0.3: v1(91.65,81.76) 91.04,81.76 84.94,75.66 84.94,74.3
  BOTTOM w0.3: v1(91.65,81.76) 91.65,83.39 J4.34
DATA_A14: length 11.7
  TOP w0.3: J1.68 83.67,75.13 84.44,75.9 84.44,76.86 v1(89.37,81.78)
  BOTTOM w0.3: J4.33 v1(89.37,81.78)
DATA_A15: length 11.2
  TOP w0.3: v1(86.83,81.73) 82.41,77.31 J1.69
  BOTTOM w0.3: J4.32 v1(86.83,81.73)
DATA_A16: length 11.2
  TOP w0.3: v1(84.29,81.66) 79.86,77.23 79.86,74.3
  BOTTOM w0.3: J4.31 v1(84.29,81.66)
DATA_A17: length 10.7
  TOP w0.3: J1.72 78.59,78.47 v1(81.75,81.63)
  BOTTOM w0.3: J4.30 v1(81.75,81.63)
DATA_A18: length 10.1
  TOP w0.3: J1.73 77.33,79.98 v1(79.21,81.87)
  BOTTOM w0.3: J4.29 v1(79.21,81.87)
DATA_A19: length 9.6
  TOP w0.3: J1.74 76.06,81.16 v1(76.67,81.77)
  BOTTOM w0.3: J4.28 v1(76.67,81.77)
DATA_A20: length 9.6
  TOP w0.3: v1(74.13,81.85) 74.78,81.19 74.78,74.3
  BOTTOM w0.3: J4.27 v1(74.13,81.85)
DATA_A21: length 10.1
  TOP w0.3: J1.76 73.52,79.98 v1(71.59,81.91)
  BOTTOM w0.3: J4.26 v1(71.59,81.91)
DATA_A22: length 10.7
  TOP w0.3: J1.77 72.25,78.59 v1(69.05,81.79)
  BOTTOM w0.3: J4.25 v1(69.05,81.79)
DATA_A23: length 11.2
  TOP w0.3: v1(66.51,81.84) 70.97,77.38 J1.78
  BOTTOM w0.3: J4.24 v1(66.51,81.84)
DATA_A24: length 11.7
  TOP w0.3: v1(63.97,81.87) 69.7,76.14 69.7,74.3
  BOTTOM w0.3: J4.23 v1(63.97,81.87)
DATA_A25: length 11.7
  TOP w0.3: J1.81 67.17,75.97 v1(61.43,81.71)
  BOTTOM w0.3: J4.22 v1(61.43,81.71)
DATA_A26: length 12.7
  TOP w0.3: J1.82 65.89,75.8 65.85,75.85 65,75.85 v1(59.11,81.74)
  BOTTOM w0.3: J4.21 58.89,81.96 v1(59.11,81.74)
DATA_A27: length 13.3
  TOP w0.3: v1(57.52,82.4) 64.62,75.3 J1.83
  BOTTOM w0.3: J4.20 57.25,83.65 57.52,83.39 v1(57.52,82.4)
DATA_A28: length 14.3
  TOP w0.3: J1.84 63.36,75.8 63.31,75.85 62.09,75.85 v1(56.46,81.48)
  BOTTOM w0.3: v1(56.46,81.48) 56.38,81.48 54.2,83.65 J4.19
DATA_A29: length 15.9
  TOP w0.3: v1(54.98,81.74) 60.87,75.85 61.33,75.85 62.08,75.09 62.08,74.3
  BOTTOM w0.3: v1(54.98,81.74) 51.83,81.74 51.27,82.3 J4.18
DATA_A30: length 19.3
  TOP w0.3: J1.86 60.81,75.09 60.06,75.85 59.5,75.85 53,82.35 v1(47.6,82.35)
  BOTTOM w0.3: v1(47.6,82.35) 47.6,83.42 47.83,83.65 J4.17
DATA_A31: length 18.6
  TOP w0.3: v1(46.19,82.02) 46.67,81.54 52.54,81.54 58.23,75.85 58.79,75.85 59.55,75.09 J1.87
  BOTTOM w0.3: J4.16 v1(46.19,82.02)
DATA_A32: length 19.9
  TOP w0.3: J1.88 58.28,75.09 57.52,75.85 56.96,75.85 51.78,81.03 44.6,81.03 v1(43.65,81.98)
  BOTTOM w0.3: J4.15 v1(43.65,81.98)
DATA_A33: length 21.2
  TOP w0.3: 57,74.3 57,75.09 51.63,80.47 42.7,80.47 v1(41.11,82.06)
  BOTTOM w0.3: J4.14 v1(41.11,82.06)
DATA_A34: length 21.2
  TOP w0.3: J1.91 54.47,75.13 49.63,79.96 40.66,79.96 v1(38.57,82.05)
  BOTTOM w0.3: J4.13 v1(38.57,82.05)
DATA_A35: length 22.5
  TOP w0.3: J1.92 53.2,75.13 48.88,79.44 38.6,79.44 v1(36.03,82.01)
  BOTTOM w0.3: J4.12 v1(36.03,82.01)
DATA_A36: length 23.7
  TOP w0.3: v1(33.49,82.02) 36.57,78.94 48.12,78.94 51.92,75.13 51.92,74.3
  BOTTOM w0.3: J4.11 v1(33.49,82.02)
DATA_A37: length 25
  TOP w0.3: v1(30.95,81.99) 34.55,78.39 47.4,78.39 50.66,75.13 J1.94
  BOTTOM w0.3: J4.10 v1(30.95,81.99)
DATA_A38: length 26.3
  TOP w0.3: 49.38,74.3 49.38,75.13 46.62,77.89 32.58,77.89 v1(28.41,82.06)
  BOTTOM w0.3: J4.9 v1(28.41,82.06)
DATA_A39: length 27.5
  TOP w0.3: J1.96 48.12,75.13 45.9,77.35 30.68,77.35 v1(25.87,82.16)
  BOTTOM w0.3: J4.8 v1(25.87,82.16)
DATA_A40: length 28.9
  TOP w0.3: 46.84,74.3 46.84,75.13 45.12,76.85 28.41,76.85 v1(23.33,81.93)
  BOTTOM w0.3: J4.7 v1(23.33,81.93)
DATA_A41: length 30.1
  TOP w0.3: v1(20.79,82.05) 26.49,76.35 44.35,76.35 45.58,75.13 J1.98
  BOTTOM w0.3: J4.6 v1(20.79,82.05)
DATA_A42: length 31.6
  TOP w0.3: v1(18.17,81.82) 24.14,75.85 43.59,75.85 44.3,75.13 44.3,74.3
  BOTTOM w0.3: J4.5 18.17,83.57 v1(18.17,81.82)
DATA_B0: length 29.1
  TOP w0.3: 102.72,69.9 v1(102.72,68.1)
  BOTTOM w0.3: J5.14 125.38,75.99 118.83,69.44 104.06,69.44 v1(102.72,68.1)
DATA_B1: length 27.2
  TOP w0.3: J1.47 v1(101.45,68.16)
  BOTTOM w0.3: v1(101.45,68.16) 103.42,70.12 116.07,70.12 122.84,76.89 J5.15
DATA_B2: length 25.9
  TOP w0.3: J1.46 v1(100.19,68.15)
  BOTTOM w0.3: J5.16 120.3,76.89 114.17,70.75 102.8,70.75 v1(100.19,68.15)
DATA_B3: length 24.8
  TOP w0.3: J1.45 v1(98.92,68.08)
  BOTTOM w0.3: J5.17 117.76,76.89 112.12,71.25 102.09,71.25 v1(98.92,68.08)
DATA_B4: length 23.5
  TOP w0.3: 97.64,69.9 v1(97.64,68.06)
  BOTTOM w0.3: v1(97.64,68.06) 101.4,71.82 110.15,71.82 115.22,76.89 J5.18
DATA_B5: length 22.3
  TOP w0.3: J1.43 v1(96.38,68)
  BOTTOM w0.3: J5.19 112.68,76.89 108.18,72.39 100.76,72.39 v1(96.38,68)
DATA_B6: length 21.1
  TOP w0.3: J1.42 v1(95.11,67.97)
  BOTTOM w0.3: v1(95.11,67.97) 100.02,72.89 106.14,72.89 110.14,76.89 J5.20
DATA_B7: length 20.5
  TOP w0.3: J1.40 v1(92.56,68.06)
  BOTTOM w0.3: J4.41 107.15,76.9 103.64,73.39 97.9,73.39 v1(92.56,68.06)
DATA_B8: length 19.3
  TOP w0.3: J1.39 v1(91.3,68.03)
  BOTTOM w0.3: J4.42 104.61,76.9 101.6,73.89 97.15,73.89 v1(91.3,68.03)
DATA_B9: length 18.1
  TOP w0.3: J1.38 v1(90.03,67.97)
  BOTTOM w0.3: J4.43 102.07,76.9 99.56,74.39 96.8,74.39 95.93,73.52 95.57,73.52 v1(90.03,67.97)
DATA_B10: length 16.9
  TOP w0.3: J1.37 v1(88.75,67.91)
  BOTTOM w0.3: v1(88.75,67.91) 95.16,74.32 96.02,74.32 96.59,74.89 97.52,74.89 99.53,76.9 J4.44
DATA_B11: length 15.4
  TOP w0.3: 87.48,69.9 v1(87.48,67.94)
  BOTTOM w0.3: J4.45 87.58,67.94 v1(87.48,67.94)
DATA_B12: length 14.7
  TOP w0.3: J1.35 v1(86.22,67.97)
  BOTTOM w0.3: J4.46 94.45,76.2 v1(86.22,67.97)
DATA_B13: length 14.3
  TOP w0.3: 84.94,69.9 v1(84.94,67.9)
  BOTTOM w0.3: J4.47 91.91,74.86 v1(84.94,67.9)
DATA_B14: length 13.7
  TOP w0.3: J1.33 v1(83.67,67.97)
  BOTTOM w0.3: J4.48 89.37,73.66 v1(83.67,67.97)
DATA_B15: length 13.4
  TOP w0.3: J1.32 v1(82.41,67.85)
  BOTTOM w0.3: J4.49 86.83,76.9 82.41,72.47 v1(82.41,67.85)
DATA_B16: length 13.6
  TOP w0.3: 79.86,69.9 v1(79.86,67.73)
  BOTTOM w0.3: J4.50 84.29,76.9 79.86,72.47 v1(79.86,67.73)
DATA_B17: length 13
  TOP w0.3: J1.29 v1(78.59,67.8)
  BOTTOM w0.3: v1(78.59,67.8) 78.59,73.75 81.75,76.9 J4.51
DATA_B18: length 12.3
  TOP w0.3: J1.28 v1(77.33,67.88)
  BOTTOM w0.3: J4.52 79.21,76.9 77.33,75.02 v1(77.33,67.88)
DATA_B19: length 11.7
  TOP w0.3: J1.27 v1(76.06,67.9)
  BOTTOM w0.3: J4.53 76.67,68.51 v1(76.06,67.9)
DATA_B20: length 11.5
  TOP w0.3: 74.78,69.9 v1(74.78,68)
  BOTTOM w0.3: J4.54 74.13,68.65 v1(74.78,68)
DATA_B21: length 12.2
  TOP w0.3: J1.25 v1(73.52,67.91)
  BOTTOM w0.3: J4.55 71.59,69.83 v1(73.52,67.91)
DATA_B22: length 13
  TOP w0.3: J1.24 v1(72.25,67.78)
  BOTTOM w0.3: v1(72.25,67.78) 69.05,70.97 J4.56
DATA_B23: length 13.4
  TOP w0.3: J1.23 v1(70.97,67.87)
  BOTTOM w0.3: J4.57 66.51,72.33 v1(70.97,67.87)
DATA_B24: length 13.8
  TOP w0.3: 69.7,69.9 v1(69.7,67.91)
  BOTTOM w0.3: J4.58 63.97,73.65 v1(69.7,67.91)
DATA_B25: length 14
  TOP w0.3: J1.20 v1(67.17,67.81)
  BOTTOM w0.3: v1(67.17,67.81) 61.43,73.55 J4.59
DATA_B26: length 14.4
  TOP w0.3: J1.19 v1(65.89,67.9)
  BOTTOM w0.3: v1(65.89,67.9) 58.89,74.9 J4.60
DATA_B27: length 14.5
  TOP w0.3: J1.18 v1(64.62,68.08)
  BOTTOM w0.3: J4.61 56.35,76.35 v1(64.62,68.08)
DATA_B28: length 15
  TOP w0.3: J1.17 v1(63.36,68.19)
  BOTTOM w0.3: v1(63.36,68.19) 62.59,68.96 62.2,68.96 J4.62
DATA_B29: length 16.8
  TOP w0.3: 62.08,69.9 v1(62.08,68.05)
  BOTTOM w0.3: J4.63 51.27,76.9 57.54,70.63 59.5,70.63 v1(62.08,68.05)
DATA_B30: length 18
  TOP w0.3: J1.15 v1(60.81,68.1)
  BOTTOM w0.3: J4.64 48.73,76.9 55.5,70.13 58.79,70.13 v1(60.81,68.1)
DATA_B31: length 19.2
  TOP w0.3: J1.14 v1(59.55,68.13)
  BOTTOM w0.3: v1(59.55,68.13) 58.05,69.63 54.6,69.63 53.24,70.99 52.1,70.99 46.19,76.9 J4.65
DATA_B32: length 20.5
  TOP w0.3: J1.13 v1(58.28,68.15)
  BOTTOM w0.3: J4.66 43.65,76.9 48,72.55 49.3,72.55 51.36,70.49 53.03,70.49 54.39,69.13 57.29,69.13 v1(58.28,68.15)
DATA_B33: length 21.9
  TOP w0.3: 57,69.9 v1(57,68.02)
  BOTTOM w0.3: v1(57,68.02) 56.39,68.63 54.18,68.63 52.82,69.99 51.16,69.99 49.16,71.99 47.04,71.99 46.49,72.54 45.47,72.54 41.11,76.9 J4.67
DATA_B34: length 22
  TOP w0.3: J1.10 v1(54.47,67.97)
  BOTTOM w0.3: J4.68 38.57,76.9 43.43,72.04 46.03,72.04 46.58,71.49 48.95,71.49 50.95,69.49 52.62,69.49 54.13,67.97 v1(54.47,67.97)
DATA_B35: length 23.2
  TOP w0.3: J1.9 v1(53.2,67.98)
  BOTTOM w0.3: v1(53.2,67.98) 52.19,68.99 50.74,68.99 48.74,70.99 46.37,70.99 45.82,71.54 41.39,71.54 36.03,76.9 J4.69
DATA_B36: length 24.5
  TOP w0.3: 51.92,69.9 v1(51.92,67.97)
  BOTTOM w0.3: J4.70 33.49,76.9 39.35,71.04 45.61,71.04 46.16,70.49 48.54,70.49 50.54,68.49 51.41,68.49 v1(51.92,67.97)
DATA_B37: length 26
  TOP w0.3: J1.7 v1(50.66,67.84)
  BOTTOM w0.3: J4.71 30.95,76.9 37.31,70.54 45.41,70.54 45.96,69.99 48.33,69.99 50.48,67.84 v1(50.66,67.84)
DATA_B38: length 27.2
  TOP w0.3: 49.38,69.9 v1(49.38,67.84)
  BOTTOM w0.3: v1(49.38,67.84) 47.74,69.49 45.75,69.49 45.2,70.04 35.27,70.04 28.41,76.9 J4.72
DATA_B39: length 28.4
  TOP w0.3: J1.5 v1(48.12,67.91)
  BOTTOM w0.3: J4.73 25.87,76.9 33.23,69.54 44.99,69.54 45.54,68.99 47.04,68.99 v1(48.12,67.91)
DATA_B40: length 29.6
  TOP w0.3: 46.84,69.9 v1(46.84,67.94)
  BOTTOM w0.3: J4.74 23.33,76.9 31.19,69.04 44.78,69.04 45.33,68.49 46.3,68.49 v1(46.84,67.94)
DATA_B41: length 30.8
  TOP w0.3: J1.3 v1(45.58,67.84)
  BOTTOM w0.3: v1(45.58,67.84) 45.28,67.84 44.58,68.54 29.6,68.54 J4.75
DATA_B42: length 32.8
  TOP w0.3: 44.3,69.9 v1(44.3,67.88)
  BOTTOM w0.3: J4.76 18.25,76 22.88,71.37 25.86,71.37 29.34,67.88 v1(44.3,67.88)
DATA_C0: length 23.4
  TOP w0.3: 102.72,22.3 v1(102.72,24.2)
  BOTTOM w0.3: v1(102.72,24.2) 111.92,24.2 120.3,15.81 J9.5
DATA_C1: length 22
  TOP w0.3: J3.54 v1(101.45,24.14)
  BOTTOM w0.3: J9.4 117.76,15.81 113.05,20.52 105.07,20.52 v1(101.45,24.14)
DATA_C2: length 20.8
  TOP w0.3: J3.55 v1(100.19,24.14)
  BOTTOM w0.3: J9.3 115.22,15.81 111.11,19.91 104.42,19.91 v1(100.19,24.14)
DATA_C3: length 19.4
  TOP w0.3: J3.56 v1(98.92,24.05)
  BOTTOM w0.3: J9.2 112.68,15.81 109.14,19.35 103.62,19.35 v1(98.92,24.05)
DATA_C4: length 18.1
  TOP w0.3: 97.64,22.3 v1(97.64,24.04)
  BOTTOM w0.3: v1(97.64,24.04) 102.83,18.85 107.1,18.85 110.14,15.81 J9.1
DATA_C5: length 16.4
  TOP w0.3: J3.58 v1(96.38,24.07)
  BOTTOM w0.3: J8.40 107.15,15.81 104.61,18.35 102.1,18.35 v1(96.38,24.07)
DATA_C6: length 15.2
  TOP w0.3: J3.59 v1(95.11,24.09)
  BOTTOM w0.3: v1(95.11,24.09) 101.35,17.85 102.57,17.85 104.61,15.81 J8.39
DATA_C7: length 15.1
  TOP w0.3: J3.61 v1(92.56,24.05)
  BOTTOM w0.3: v1(92.56,24.05) 93.83,24.05 102.07,15.81 J8.38
DATA_C8: length 14.1
  TOP w0.3: J3.62 v1(91.3,24.2)
  BOTTOM w0.3: J8.37 91.3,23.59 v1(91.3,24.2)
DATA_C9: length 13.6
  TOP w0.3: J3.63 v1(90.03,24.18)
  BOTTOM w0.3: J8.36 96.99,15.81 90.03,22.77 v1(90.03,24.18)
DATA_C10: length 12.8
  TOP w0.3: J3.64 v1(88.75,24.07)
  BOTTOM w0.3: J8.35 94.45,15.81 88.75,21.51 v1(88.75,24.07)
DATA_C11: length 12.4
  TOP w0.3: 87.48,22.3 v1(87.48,24.11)
  BOTTOM w0.3: v1(87.48,24.11) 87.48,20.23 91.91,15.81 J8.34
DATA_C12: length 11.9
  TOP w0.3: J3.66 v1(86.22,24.14)
  BOTTOM w0.3: v1(86.22,24.14) 86.22,18.96 89.37,15.81 J8.33
DATA_C13: length 11.7
  TOP w0.3: 84.94,22.3 v1(84.94,24.3)
  BOTTOM w0.3: v1(84.94,24.3) 84.94,17.7 86.83,15.81 J8.32
DATA_C14: length 10.9
  TOP w0.3: J3.68 v1(83.67,24.16)
  BOTTOM w0.3: v1(83.67,24.16) 84.29,23.55 J8.31
DATA_C15: length 10.9
  TOP w0.3: J3.69 v1(82.41,24.12)
  BOTTOM w0.3: J8.30 81.75,23.47 v1(82.41,24.12)
DATA_C16: length 11.2
  TOP w0.3: 79.86,22.3 v1(79.86,24.32)
  BOTTOM w0.3: v1(79.86,24.32) 79.21,23.66 J8.29
DATA_C17: length 11.9
  TOP w0.3: J3.72 v1(78.59,24.36)
  BOTTOM w0.3: v1(78.59,24.36) 76.67,22.44 J8.28
DATA_C18: length 12
  TOP w0.3: J3.73 v1(77.33,24.14)
  BOTTOM w0.3: v1(77.33,24.14) 74.13,20.95 J8.27
DATA_C19: length 12.9
  TOP w0.3: J3.74 v1(76.06,24.36)
  BOTTOM w0.3: J8.26 71.59,19.9 v1(76.06,24.36)
DATA_C20: length 13.2
  TOP w0.3: 74.78,22.3 v1(74.78,24.23)
  BOTTOM w0.3: v1(74.78,24.23) 69.05,18.49 J8.25
DATA_C21: length 13.4
  TOP w0.3: J3.76 v1(73.52,24.09)
  BOTTOM w0.3: J8.24 66.51,17.09 v1(73.52,24.09)
DATA_C22: length 14
  TOP w0.3: J3.77 v1(72.25,24.11)
  BOTTOM w0.3: J8.23 63.97,15.84 v1(72.25,24.11)
DATA_C23: length 15.4
  TOP w0.3: J3.78 v1(70.97,24.21)
  BOTTOM w0.3: J8.22 61.43,15.81 68.91,23.29 70.05,23.29 v1(70.97,24.21)
DATA_C24: length 16.3
  TOP w0.3: 69.7,22.3 v1(69.7,24.12)
  BOTTOM w0.3: v1(69.7,24.12) 68.13,24.12 67.44,23.43 66.96,23.43 J8.21
DATA_C25: length 16.5
  TOP w0.3: J3.81 v1(67.17,24.09)
  BOTTOM w0.3: v1(67.17,24.09) 66.84,24.09 64.03,21.28 61.82,21.28 56.35,15.81 J8.20
DATA_C26: length 17.5
  TOP w0.3: J3.82 v1(65.89,24.07)
  BOTTOM w0.3: v1(65.89,24.07) 63.61,21.78 61.23,21.78 60.36,20.91 59.36,20.91 J8.19
DATA_C27: length 18.6
  TOP w0.3: J3.83 v1(64.62,24)
  BOTTOM w0.3: v1(64.62,24) 63.06,22.44 61.18,22.44 60.28,21.54 58.88,21.54 58.31,20.97 56.88,20.97 J8.18
DATA_C28: length 20.3
  TOP w0.3: J3.84 v1(63.36,24.07)
  BOTTOM w0.3: J8.17 48.73,15.81 50.87,17.95 52.83,17.95 56.35,21.47 58.11,21.47 58.67,22.04 60.07,22.04 60.98,22.94 62.23,22.94 v1(63.36,24.07)
DATA_C29: length 21.6
  TOP w0.3: 62.08,22.3 v1(62.08,24.11)
  BOTTOM w0.3: v1(62.08,24.11) 61.41,23.44 60.77,23.44 59.86,22.54 58.46,22.54 57.9,21.97 56.14,21.97 52.62,18.45 48.83,18.45 46.19,15.81 J8.16
DATA_C30: length 22.8
  TOP w0.3: J3.86 v1(60.81,24.09)
  BOTTOM w0.3: J8.15 43.65,15.81 46.36,18.52 47.92,18.52 48.44,19.04 52.5,19.04 55.93,22.47 57.69,22.47 58.26,23.04 59.66,23.04 60.72,24.09 v1(60.81,24.09)
DATA_C31: length 24
  TOP w0.3: J3.87 v1(59.55,24.02)
  BOTTOM w0.3: v1(59.55,24.02) 59.07,23.54 58.05,23.54 57.48,22.97 55.73,22.97 52.3,19.54 48.23,19.54 47.71,19.02 44.32,19.02 41.11,15.81 J8.14
DATA_C32: length 25.5
  TOP w0.3: J3.88 58.28,24.16 v1(58.25,24.19)
  BOTTOM w0.3: v1(58.25,24.19) 58,24.19 57.28,23.47 55.52,23.47 52.09,20.04 48.02,20.04 47.5,19.52 42.28,19.52 38.57,15.81 J8.13
DATA_C33: length 26.7
  TOP w0.3: 57,22.3 v1(57,24.12)
  BOTTOM w0.3: v1(57,24.12) 55.39,24.12 51.81,20.54 47.82,20.54 47.3,20.02 40.24,20.02 36.03,15.81 J8.12
DATA_C34: length 26.7
  TOP w0.3: J3.91 v1(54.47,24.12)
  BOTTOM w0.3: v1(54.47,24.12) 51.38,21.04 47.61,21.04 47.09,20.52 38.2,20.52 33.49,15.81 J8.11
DATA_C35: length 27.8
  TOP w0.3: J3.92 v1(53.2,24.04)
  BOTTOM w0.3: J8.10 30.95,15.81 36.16,21.02 46.88,21.02 47.4,21.54 50.7,21.54 v1(53.2,24.04)
DATA_C36: length 29.1
  TOP w0.3: 51.92,22.3 v1(51.92,24.05)
  BOTTOM w0.3: v1(51.92,24.05) 49.91,22.04 47.2,22.04 46.68,21.52 34.12,21.52 28.41,15.81 J8.9
DATA_C37: length 30.5
  TOP w0.3: J3.94 v1(50.66,24.11)
  BOTTOM w0.3: v1(50.66,24.11) 49.09,22.54 46.99,22.54 46.47,22.02 32.08,22.02 25.87,15.81 J8.8
DATA_C38: length 31.8
  TOP w0.3: 49.38,22.3 v1(49.38,24.18)
  BOTTOM w0.3: v1(49.38,24.18) 48.25,23.04 46.78,23.04 46.26,22.52 30.75,22.52 27.3,19.07 26.59,19.07 23.33,15.81 J8.7
DATA_C39: length 33.1
  TOP w0.3: J3.96 v1(48.12,24.18)
  BOTTOM w0.3: v1(48.12,24.18) 47.48,23.54 46.57,23.54 46.05,23.02 30.54,23.02 27.09,19.57 24.55,19.57 20.79,15.81 J8.6
DATA_C40: length 34.4
  TOP w0.3: 46.84,22.3 v1(46.84,24.2)
  BOTTOM w0.3: v1(46.84,24.2) 46.53,24.2 45.85,23.52 30.33,23.52 26.88,20.07 22.51,20.07 18.25,15.81 J8.5
DATA_C41: length 36.2
  TOP w0.3: J3.98 v1(45.58,24.18)
  BOTTOM w0.3: J8.4 15.71,16.71 19.57,20.57 26.57,20.57 30.18,24.18 v1(45.58,24.18)
DATA_C42: length 23.5
  TOP w0.3: J6.20 24.05,23.11 41.78,23.11 42.52,23.85 43.59,23.85 44.3,23.13 44.3,22.3
DATA_D0: length 22.8
  TOP w0.3: v1(120.3,10.93) 119.87,11.36 116.3,11.36 111.31,16.35 103.44,16.35 102.72,17.07 102.72,17.9
  BOTTOM w0.3: J9.16 v1(120.3,10.93)
DATA_D1: length 21.9
  TOP w0.3: v1(117.76,10.71) 116.25,10.71 113.55,13.4 104.25,13.4 101.45,16.2 J3.47
  BOTTOM w0.3: J9.17 v1(117.76,10.71)
DATA_D2: length 20.6
  TOP w0.3: v1(115.22,10.81) 113.13,12.9 103.64,12.9 100.19,16.36 J3.46
  BOTTOM w0.3: J9.18 v1(115.22,10.81)
DATA_D3: length 19
  TOP w0.3: v1(112.68,10.79) 111.07,12.4 103.43,12.4 98.92,16.92 J3.45
  BOTTOM w0.3: J9.19 v1(112.68,10.79)
DATA_D4: length 18.1
  TOP w0.3: v1(110.14,10.74) 108.06,10.74 107.42,11.37 105.62,11.37 105.09,11.9 103.23,11.9 102.76,12.37 101.45,12.37 97.64,16.18 97.64,17.9
  BOTTOM w0.3: J9.20 v1(110.14,10.74)
DATA_D5: length 16.4
  TOP w0.3: J3.43 96.38,16.26 100.76,11.87 102.55,11.87 103.02,11.4 104.88,11.4 105.57,10.72 v1(107.15,10.72)
  BOTTOM w0.3: J8.41 v1(107.15,10.72)
DATA_D6: length 14.8
  TOP w0.3: J3.42 95.11,16.82 100.55,11.37 102.34,11.37 102.97,10.75 v1(104.61,10.75)
  BOTTOM w0.3: J8.42 v1(104.61,10.75)
DATA_D7: length 14.6
  TOP w0.3: v1(102.07,10.72) 100.5,10.72 99.8,11.41 98.22,11.41 92.56,17.07 J3.40
  BOTTOM w0.3: J8.43 v1(102.07,10.72)
DATA_D8: length 13.9
  TOP w0.3: J3.39 91.3,16.18 95.99,11.48 97.26,11.48 97.99,10.76 v1(99.53,10.76)
  BOTTOM w0.3: J8.44 v1(99.53,10.76)
DATA_D9: length 12.7
  TOP w0.3: J3.38 90.03,16.16 95.36,10.83 v1(96.99,10.83)
  BOTTOM w0.3: J8.45 v1(96.99,10.83)
DATA_D10: length 11.2
  TOP w0.3: J3.37 88.75,16.51 v1(94.45,10.81)
  BOTTOM w0.3: J8.46 v1(94.45,10.81)
DATA_D11: length 10.7
  TOP w0.3: v1(91.91,10.7) 87.48,15.12 87.48,17.9
  BOTTOM w0.3: J8.47 v1(91.91,10.7)
DATA_D12: length 10.1
  TOP w0.3: v1(89.37,10.66) 86.22,13.82 J3.35
  BOTTOM w0.3: J8.48 v1(89.37,10.66)
DATA_D13: length 9.6
  TOP w0.3: v1(86.83,10.75) 84.94,12.63 84.94,17.9
  BOTTOM w0.3: J8.49 v1(86.83,10.75)
DATA_D14: length 9.1
  TOP w0.3: v1(84.29,10.78) 83.67,11.39 J3.33
  BOTTOM w0.3: J8.50 v1(84.29,10.78)
DATA_D15: length 9.1
  TOP w0.3: J3.32 82.41,11.59 v1(81.75,10.93)
  BOTTOM w0.3: J8.51 v1(81.75,10.93)
DATA_D16: length 9.1
  TOP w0.3: 79.86,17.9 79.86,11.5 v1(79.21,10.85)
  BOTTOM w0.3: J8.52 v1(79.21,10.85)
DATA_D17: length 9.6
  TOP w0.3: J3.29 78.59,12.89 v1(76.67,10.97)
  BOTTOM w0.3: J8.53 v1(76.67,10.97)
DATA_D18: length 10.2
  TOP w0.3: v1(74.13,11.02) 77.33,14.21 J3.28
  BOTTOM w0.3: J8.54 v1(74.13,11.02)
DATA_D19: length 10.7
  TOP w0.3: J3.27 76.06,15.29 v1(71.59,10.83)
  BOTTOM w0.3: J8.55 v1(71.59,10.83)
DATA_D20: length 11.2
  TOP w0.3: 74.78,17.9 74.78,16.66 v1(69.05,10.92)
  BOTTOM w0.3: J8.56 v1(69.05,10.92)
DATA_D21: length 12.1
  TOP w0.3: J3.25 73.52,16.98 v1(67.17,10.63)
  BOTTOM w0.3: J8.57 66.51,10.58 66.56,10.63 v1(67.17,10.63)
DATA_D22: length 12.7
  TOP w0.3: v1(64.98,10.52) 70.31,15.85 71.03,15.85 72.25,17.07 J3.24
  BOTTOM w0.3: J8.58 63.97,9.51 v1(64.98,10.52)
DATA_D23: length 13.7
  TOP w0.3: J3.23 70.97,17.11 70.22,16.35 69.78,16.35 v1(62.49,9.06)
  BOTTOM w0.3: J8.59 v1(62.49,9.06)
DATA_D24: length 15
  TOP w0.3: 69.7,17.9 69.7,17.07 64.44,11.8 v1(62.74,11.8)
  BOTTOM w0.3: J8.60 59.28,9.06 60.69,10.46 61.4,10.46 v1(62.74,11.8)
DATA_D25: length 15
  TOP w0.3: J3.20 67.17,17.07 65.94,15.85 65.2,15.85 v1(61.04,11.69)
  BOTTOM w0.3: v1(61.04,11.69) 59.81,10.46 58.14,10.46 56.75,9.06 J8.61
DATA_D26: length 16.2
  TOP w0.3: J3.19 65.89,17.11 65.14,16.35 64.58,16.35 57.42,9.19 v1(54.84,9.19)
  BOTTOM w0.3: v1(54.84,9.19) 54.71,9.06 J8.62
DATA_D27: length 18.3
  TOP w0.3: v1(58.96,12.01) 59.53,12.01 64.62,17.11 J3.18
  BOTTOM w0.3: J8.63 51.27,10.41 51.32,10.46 57.41,10.46 v1(58.96,12.01)
DATA_D28: length 18.8
  TOP w0.3: J3.17 62.81,17.35 62.81,16.55 62.6,16.35 62.13,16.35 56.69,10.92 54.85,10.92 52.99,9.06 v1(49.71,9.06)
  BOTTOM w0.3: J8.64 v1(49.71,9.06)
DATA_D29: length 20.8
  TOP w0.3: 62.08,17.9 62.08,17.07 56.88,11.86 v1(56.4,11.86)
  BOTTOM w0.3: v1(56.4,11.86) 47.64,11.86 46.19,10.41 J8.65
DATA_D30: length 23.9
  TOP w0.3: J3.15 60.81,17.11 60.06,16.35 59.5,16.35 53.5,10.35 43.26,10.35 v1(42.37,9.46)
  BOTTOM w0.3: v1(42.37,9.46) 42.77,9.06 J8.66
DATA_D31: length 25.2
  TOP w0.3: J3.14 59.55,17.11 58.79,16.35 58.23,16.35 52.73,10.85 41,10.85 v1(39.98,9.83)
  BOTTOM w0.3: J8.67 40.14,9.06 39.98,9.22 v1(39.98,9.83)
DATA_D32: length 24.9
  TOP w0.3: J3.13 58.28,17.11 57.52,16.35 56.96,16.35 51.96,11.35 39.11,11.35 v1(38.57,10.81)
  BOTTOM w0.3: J8.68 v1(38.57,10.81)
DATA_D33: length 26.2
  TOP w0.3: 57,17.9 57,17.11 51.75,11.85 37,11.85 v1(36.03,10.88)
  BOTTOM w0.3: J8.69 v1(36.03,10.88)
DATA_D34: length 26.1
  TOP w0.3: J3.10 54.47,17.07 49.74,12.35 35.08,12.35 v1(33.49,10.76)
  BOTTOM w0.3: J8.70 v1(33.49,10.76)
DATA_D35: length 27.4
  TOP w0.3: J3.9 53.2,17.07 48.98,12.85 32.96,12.85 v1(30.95,10.84)
  BOTTOM w0.3: J8.71 v1(30.95,10.84)
DATA_D36: length 28.7
  TOP w0.3: 51.92,17.9 51.92,17.07 48.2,13.35 30.92,13.35 v1(28.41,10.84)
  BOTTOM w0.3: J8.72 v1(28.41,10.84)
DATA_D37: length 30
  TOP w0.3: J3.7 50.66,17.07 47.44,13.85 28.87,13.85 v1(25.87,10.85)
  BOTTOM w0.3: J8.73 v1(25.87,10.85)
DATA_D38: length 31.2
  TOP w0.3: 49.38,17.9 49.38,17.07 46.66,14.35 26.91,14.35 v1(23.33,10.77)
  BOTTOM w0.3: J8.74 v1(23.33,10.77)
DATA_D39: length 32.7
  TOP w0.3: J3.5 48.12,17.07 45.9,14.85 24.57,14.85 v1(20.67,10.95)
  BOTTOM w0.3: J8.75 20.67,9.18 v1(20.67,10.95)
DATA_D40: length 34.1
  TOP w0.3: v1(18.02,10.89) 22.48,15.35 45.12,15.35 46.84,17.07 46.84,17.9
  BOTTOM w0.3: v1(18.02,10.89) 18.02,9.29 J8.76
DATA_D41: length 35.3
  TOP w0.3: J3.3 45.58,17.07 44.35,15.85 20.36,15.85 v1(15.71,11.2)
  BOTTOM w0.3: J8.77 v1(15.71,11.2)
DATA_D42: length 22.4
  TOP w0.3: 44.3,17.9 44.3,17.07 43.59,16.35 30.85,16.35 J6.21
DATA_E0: length 46.3
  TOP w0.25: v1(53.16,26.99) 63.41,37.24 J2.36
  BOTTOM w0.25: J6.22 27.93,26.99 v1(53.16,26.99)
DATA_E1: length 49
  TOP w0.25: J2.35 62.62,37.74 51.9,27.02 50.81,27.02 49.51,25.71 24.12,25.71 J6.19
DATA_E2: length 45.7
  TOP w0.25: J6.23 49.91,26.94 61.21,38.24 J2.34
DATA_E3: length 49.4
  TOP w0.25: v1(49.77,28.01) 60.5,38.74 J2.33
  BOTTOM w0.25: J6.18 24.02,25.71 25.85,25.71 28.14,28.01 v1(49.77,28.01)
DATA_E4: length 45
  TOP w0.25: J6.24 49.49,29.48 59.25,39.24 J2.32
DATA_E5: length 48.8
  TOP w0.25: J2.31 58.4,39.74 v1(49.2,30.54)
  BOTTOM w0.25: v1(49.2,30.54) 28.13,30.54 25.85,28.25 24.02,28.25 J6.17
DATA_E6: length 44.4
  TOP w0.25: J2.30 57.46,40.24 49.24,32.02 J6.25
DATA_E7: length 48.1
  TOP w0.25: v1(48.82,33.08) 56.48,40.74 J2.29
  BOTTOM w0.25: v1(48.82,33.08) 28.13,33.08 25.85,30.8 24.02,30.8 J6.16
DATA_E8: length 43.7
  TOP w0.25: J2.28 55.58,41.24 48.9,34.56 J6.26
DATA_E9: length 47.5
  TOP w0.25: J2.27 54.64,41.74 v1(48.48,35.58)
  BOTTOM w0.25: v1(48.48,35.58) 28.09,35.58 25.85,33.34 24.02,33.34 J6.15
DATA_E10: length 43.1
  TOP w0.25: J2.26 53.67,42.24 48.53,37.1 J6.27
DATA_E11: length 46.9
  TOP w0.25: v1(48.18,38.04) 52.88,42.74 J2.25
  BOTTOM w0.25: J6.14 24.02,35.88 25.85,35.88 28.01,38.04 v1(48.18,38.04)
DATA_E12: length 42.5
  TOP w0.25: J6.28 48.12,39.64 51.72,43.24 J2.24
DATA_E13: length 46.2
  TOP w0.25: J2.23 50.75,43.74 v1(47.88,40.87)
  BOTTOM w0.25: J6.13 24.02,38.41 25.85,38.41 28.3,40.87 v1(47.88,40.87)
DATA_E14: length 41.8
  TOP w0.25: J2.22 49.46,44.24 47.4,42.18 J6.29
DATA_E15: length 45.6
  TOP w0.25: J2.21 48.6,44.74 v1(47.12,43.26)
  BOTTOM w0.25: v1(47.12,43.26) 28.15,43.26 25.85,40.95 24.02,40.95 J6.12
DATA_E16: length 41.2
  TOP w0.25: J6.30 46.73,44.72 47.25,45.24 J2.20
DATA_E17: length 45
  TOP w0.25: v1(46.45,45.75) 46.46,45.74 J2.19
  BOTTOM w0.25: v1(46.45,45.75) 28.1,45.75 25.85,43.49 24.02,43.49 J6.11
DATA_E18: length 41.4
  TOP w0.25: J6.31 46.79,47.26 47.81,46.24 J2.18
DATA_E19: length 45.5
  TOP w0.25: J2.17 48.37,46.74 v1(46.97,48.14)
  BOTTOM w0.25: J6.10 24.02,46.03 25.85,46.03 27.95,48.14 v1(46.97,48.14)
DATA_E20: length 42
  TOP w0.25: J2.16 49.53,47.24 46.97,49.8 J6.32
DATA_E21: length 46.2
  TOP w0.25: J2.15 49.98,47.74 v1(46.89,50.83)
  BOTTOM w0.25: v1(46.89,50.83) 28.1,50.83 25.85,48.58 24.02,48.58 J6.9
DATA_E22: length 42.7
  TOP w0.25: J2.14 50.95,48.24 46.85,52.34 J6.33
DATA_E23: length 46.8
  TOP w0.25: v1(46.93,53.25) 51.44,48.74 J2.13
  BOTTOM w0.25: J6.8 24.02,51.12 25.85,51.12 27.98,53.25 v1(46.93,53.25)
DATA_E24: length 43.3
  TOP w0.25: J2.12 52.34,49.24 46.7,54.88 J6.34
DATA_E25: length 47.4
  TOP w0.25: J2.11 52.82,49.74 v1(46.78,55.78)
  BOTTOM w0.25: v1(46.78,55.78) 27.97,55.78 25.85,53.66 24.02,53.66 J6.7
DATA_E26: length 44
  TOP w0.25: J6.35 46.62,57.42 53.8,50.24 J2.10
DATA_E27: length 48.2
  TOP w0.25: J2.9 54.48,50.74 v1(46.67,58.55)
  BOTTOM w0.25: J6.6 24.02,56.2 25.85,56.2 28.2,58.55 v1(46.67,58.55)
DATA_E28: length 44.6
  TOP w0.25: J2.8 55.19,51.24 46.47,59.96 J6.36
DATA_E29: length 48.8
  TOP w0.25: J2.7 55.82,51.74 v1(46.59,60.97)
  BOTTOM w0.25: v1(46.59,60.97) 28.08,60.97 25.85,58.73 24.02,58.73 J6.5
DATA_E30: length 45.2
  TOP w0.25: J2.6 56.64,52.24 46.38,62.5 J6.37
DATA_E31: length 49.5
  TOP w0.25: J2.5 57.28,52.74 v1(46.4,63.62)
  BOTTOM w0.25: J6.4 24.02,61.27 25.85,61.27 28.19,63.62 v1(46.4,63.62)
DATA_E32: length 45.9
  TOP w0.25: J6.38 46.41,65.04 58.21,53.24 J2.4
DATA_E33: length 50
  TOP w0.25: J2.3 58.66,53.74 v1(46.44,65.96)
  BOTTOM w0.25: v1(46.44,65.96) 27.99,65.96 25.85,63.81 24.02,63.81 J6.3
DATA_E34: length 46.5
  TOP w0.25: J6.39 26.54,67.58 27.23,66.89 47.01,66.89 59.66,54.24 J2.2
DATA_E35: length 49.2
  TOP w0.25: v1(50.89,64.59) 60.74,54.74 J2.1
  BOTTOM w0.3: J6.2 24.05,66.33 25.86,66.33 26.27,66.74 48.74,66.74 v1(50.89,64.59)
DC: length 230.1
  TOP w0.25: v2(71.23,34.52) 66.56,34.52 66.32,34.76 J2.40 J2.39
  TOP w0.8: D1.2 130.73,50.66 R1.1
  TOP w1: J3.49 J3.50 109.17,17.9 v2(115.7,24.43) ; J1.50 J1.49 J1.52 J1.51 J1.50 ; J1.50 105.27,68.4 106.46,67.2 v2(115.7,67.2) ; v2(105.02,61.73) 118.03,61.73 125.21,54.55 D1.2 126.84,49.2 123.22,45.58 ; J3.52 J3.51 v2(105.27,26.11) ; 123.22,45.58 122.6,46.2 120.86,46.2 v2(120.11,45.45) 109.12,34.46 v2(107.83,34.46) ; 123.22,45.58 C1.1 123.22,40.73 123.23,40.72 U2.1
  BOTTOM w0.3: v2(71.23,34.52) 72.07,35.36 103.73,35.36 104.63,34.46 J7.11
  BOTTOM w1: v2(120.11,45.45) 115.7,41.05 v2(115.7,24.43) 114.65,24.43 112.97,26.11 v2(105.27,26.11) ; v2(115.7,67.2) 110.23,61.73 v2(105.02,61.73) 103.73,60.44 103.73,58.22 104.63,57.32 J7.20 J7.19 J7.18 J7.17 J7.16 J7.15 J7.14 J7.13 J7.12 J7.11 v2(107.83,34.46)
N1199797: length 5.9
  TOP w0.8: R4.1 R3.1 120.96,34.21 121.37,34.62 U2.5
N1275432: length 2.7
  TOP w0.8: D3.1 R1.2
N1275546: length 9.5
  TOP w1: SW1.2 135.44,60.11 135.44,65.08 U1.2
N1277606: length 2.7
  TOP w1: D4.1 R2.2
N4921826: length 5.6
  TOP w1: SW1.1 130.04,59.85 128.14,59.85 D1.1

## Copper pours and planes (outline as drawn; the poured copper is in the pictures)
DATA_A0 on BOTTOM (solid shape): 125.98,82.59 125.47,82.02 125.38,81.99 125.29,82.02 124.78,82.59 125.38,83.68
DATA_A1 on BOTTOM (solid shape): 123.44,82.59 122.93,82.02 122.84,81.99 122.75,82.02 122.24,82.59 122.84,83.68
DATA_A2 on BOTTOM (solid shape): 120.9,82.59 120.39,82.02 120.3,81.99 120.21,82.02 119.7,82.59 120.3,83.68
DATA_A3 on BOTTOM (solid shape): 118.36,82.59 117.85,82.02 117.76,81.99 117.67,82.02 117.16,82.59 117.76,83.68
DATA_A4 on BOTTOM (solid shape): 115.82,82.59 115.31,82.02 115.22,81.99 115.13,82.02 114.62,82.59 115.22,83.68
DATA_A5 on BOTTOM (solid shape): 113.28,82.59 112.77,82.02 112.68,81.99 112.59,82.02 112.08,82.59 112.68,83.68
DATA_A6 on BOTTOM (solid shape): 110.74,82.59 110.23,82.02 110.14,81.99 110.05,82.02 109.54,82.59 110.14,83.68
DATA_A7 on BOTTOM (solid shape): 107.75,82.6 107.24,82.03 107.15,82 107.06,82.03 106.55,82.6 107.15,83.69
DATA_A8 on BOTTOM (solid shape): 105.21,82.6 104.7,82.03 104.61,82 104.52,82.03 104.01,82.6 104.61,83.69
DATA_A9 on BOTTOM (solid shape): 102.67,82.6 102.16,82.03 102.07,82 101.98,82.03 101.47,82.6 102.07,83.69
DATA_A10 on BOTTOM (solid shape): 100.13,82.6 99.62,82.03 99.53,82 99.44,82.03 98.93,82.6 99.53,83.69
DATA_A11 on BOTTOM (solid shape): 97.59,82.6 97.08,82.03 96.99,82 96.9,82.03 96.39,82.6 96.99,83.69
DATA_A12 on BOTTOM (solid shape): 95.05,82.6 94.54,82.03 94.45,82 94.36,82.03 93.85,82.6 94.45,83.69
DATA_A13 on BOTTOM (solid shape): 92.5,82.6 91.74,81.84 91.62,81.82 91.52,81.89 91.31,82.6 91.92,83.69
DATA_A14 on BOTTOM (solid shape): 89.97,82.6 89.46,82.03 89.37,82 89.28,82.03 88.77,82.6 89.37,83.69
DATA_A15 on BOTTOM (solid shape): 87.43,82.6 86.92,82.03 86.83,82 86.74,82.03 86.23,82.6 86.83,83.69
DATA_A16 on BOTTOM (solid shape): 84.89,82.6 84.38,82.03 84.29,82 84.2,82.03 83.69,82.6 84.29,83.69
DATA_A17 on BOTTOM (solid shape): 82.35,82.6 81.84,82.03 81.75,82 81.66,82.03 81.15,82.6 81.75,83.69
DATA_A18 on BOTTOM (solid shape): 79.81,82.6 79.3,82.03 79.21,82 79.12,82.03 78.61,82.6 79.21,83.69
DATA_A19 on BOTTOM (solid shape): 77.27,82.6 76.76,82.03 76.67,82 76.58,82.03 76.07,82.6 76.67,83.69
DATA_A20 on BOTTOM (solid shape): 74.73,82.6 74.22,82.03 74.13,82 74.04,82.03 73.53,82.6 74.13,83.69
DATA_A21 on BOTTOM (solid shape): 72.19,82.6 71.68,82.03 71.59,82 71.5,82.03 70.99,82.6 71.59,83.69
DATA_A22 on BOTTOM (solid shape): 69.65,82.6 69.14,82.03 69.05,82 68.96,82.03 68.45,82.6 69.05,83.69
DATA_A23 on BOTTOM (solid shape): 67.11,82.6 66.6,82.03 66.51,82 66.42,82.03 65.91,82.6 66.51,83.69
